# Altium PCB Satellite_4U_Laser_Int_Ext_V11.PcbDoc (part 1 of 2)
Units mm, origin at the board's own origin, x right, y up, seen from the top; angles counter-clockwise.
Board outline 82 x 80 mm, 4 copper layers (L1_TOP, L2_SIGNAL, L3_GND, L4_BOT), stack 1.584 mm thick; 192 components, 101 nets, 642 pads, 592 vias.
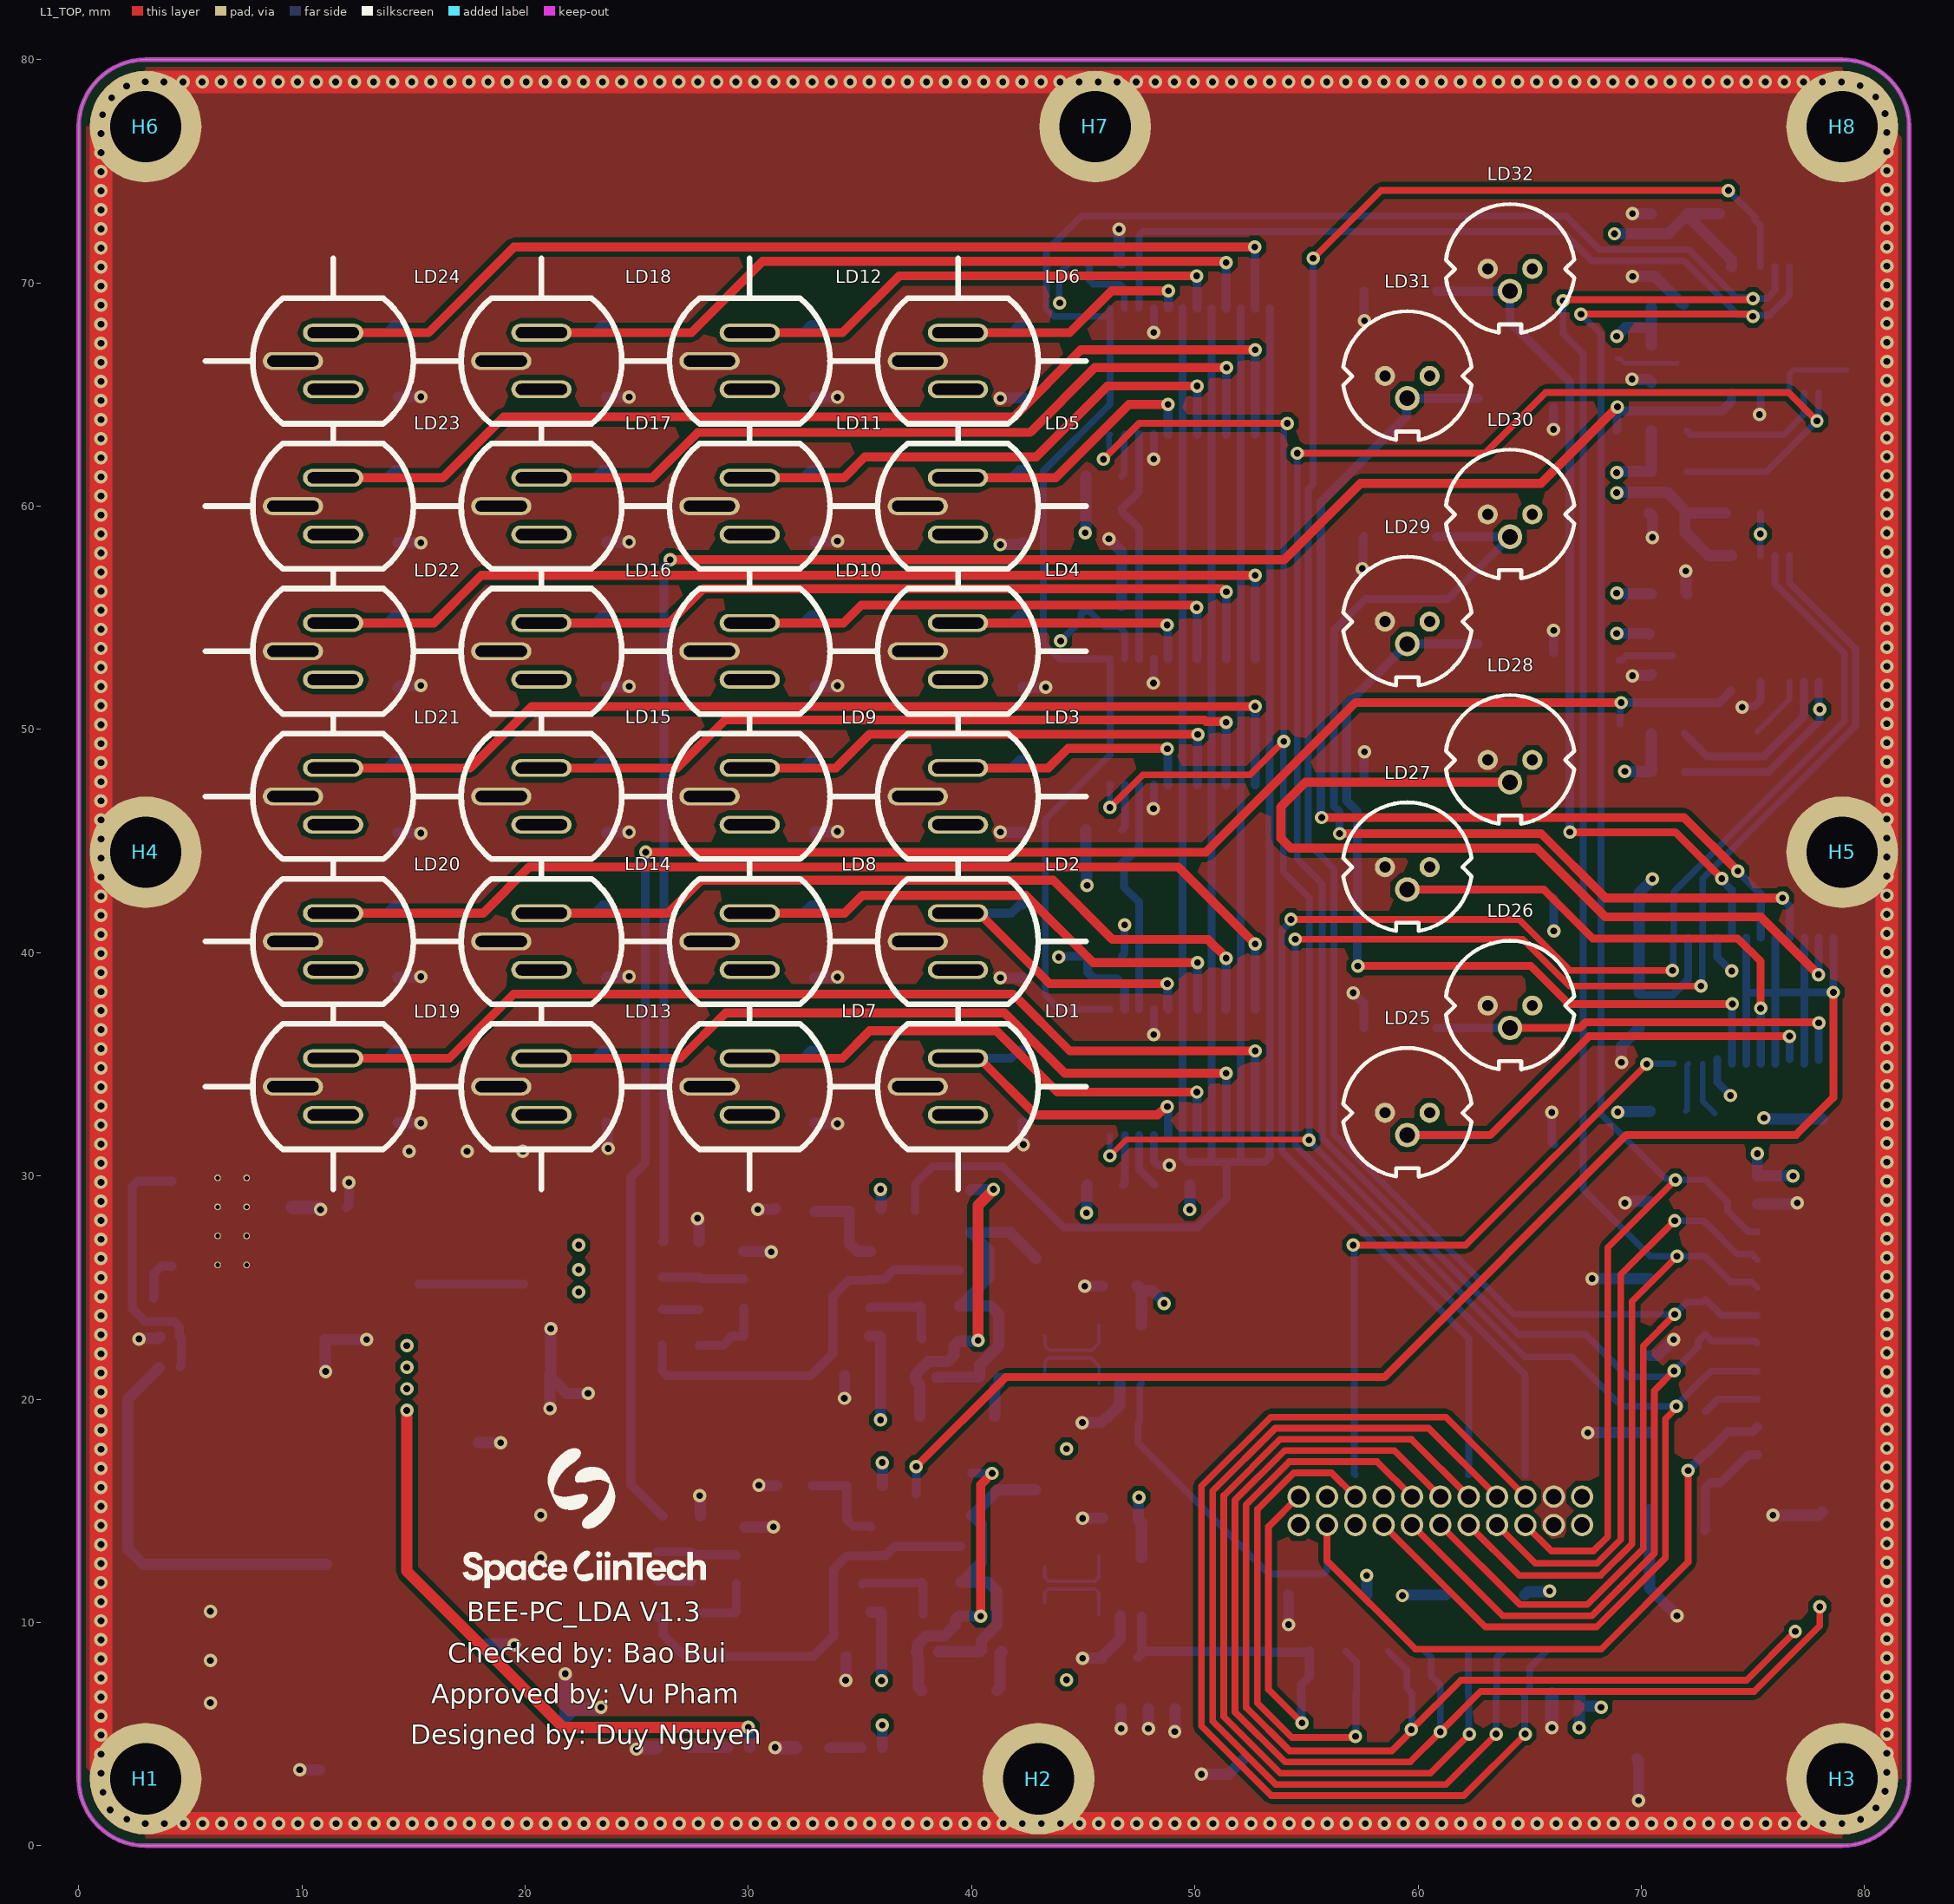
[diagram p0: L1_TOP view]
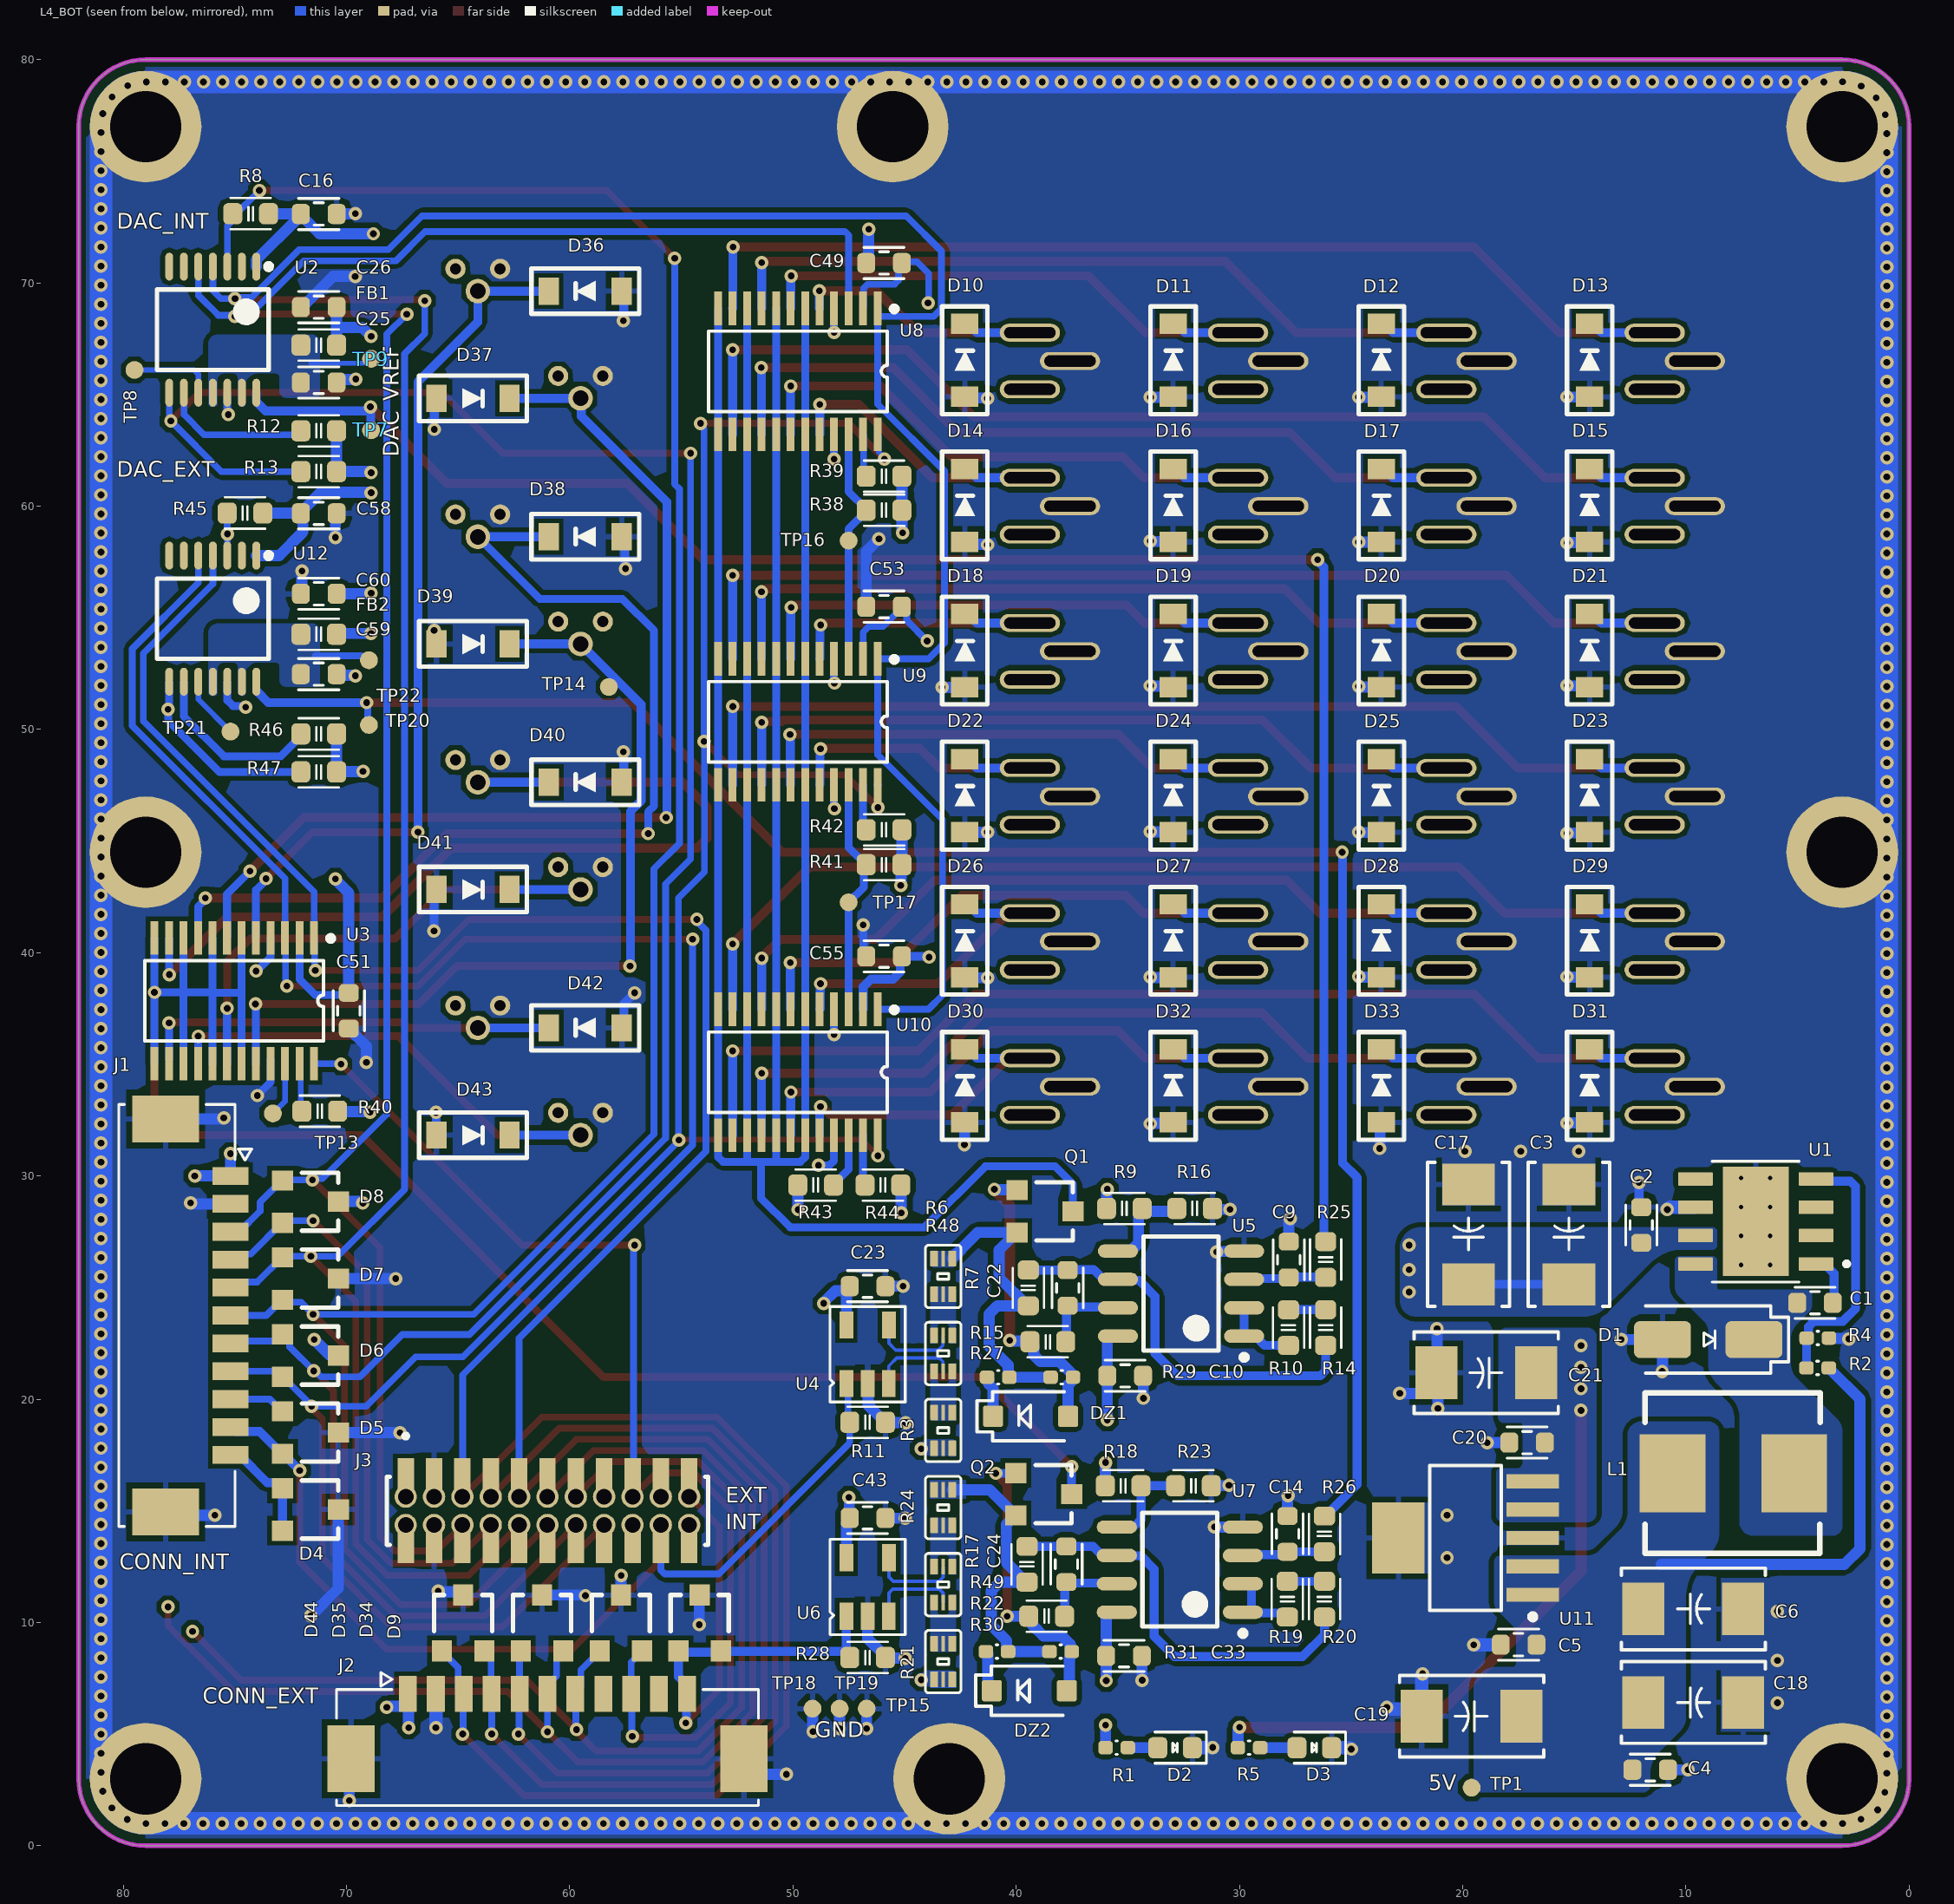
[diagram p1: L4_BOT view, seen from below]
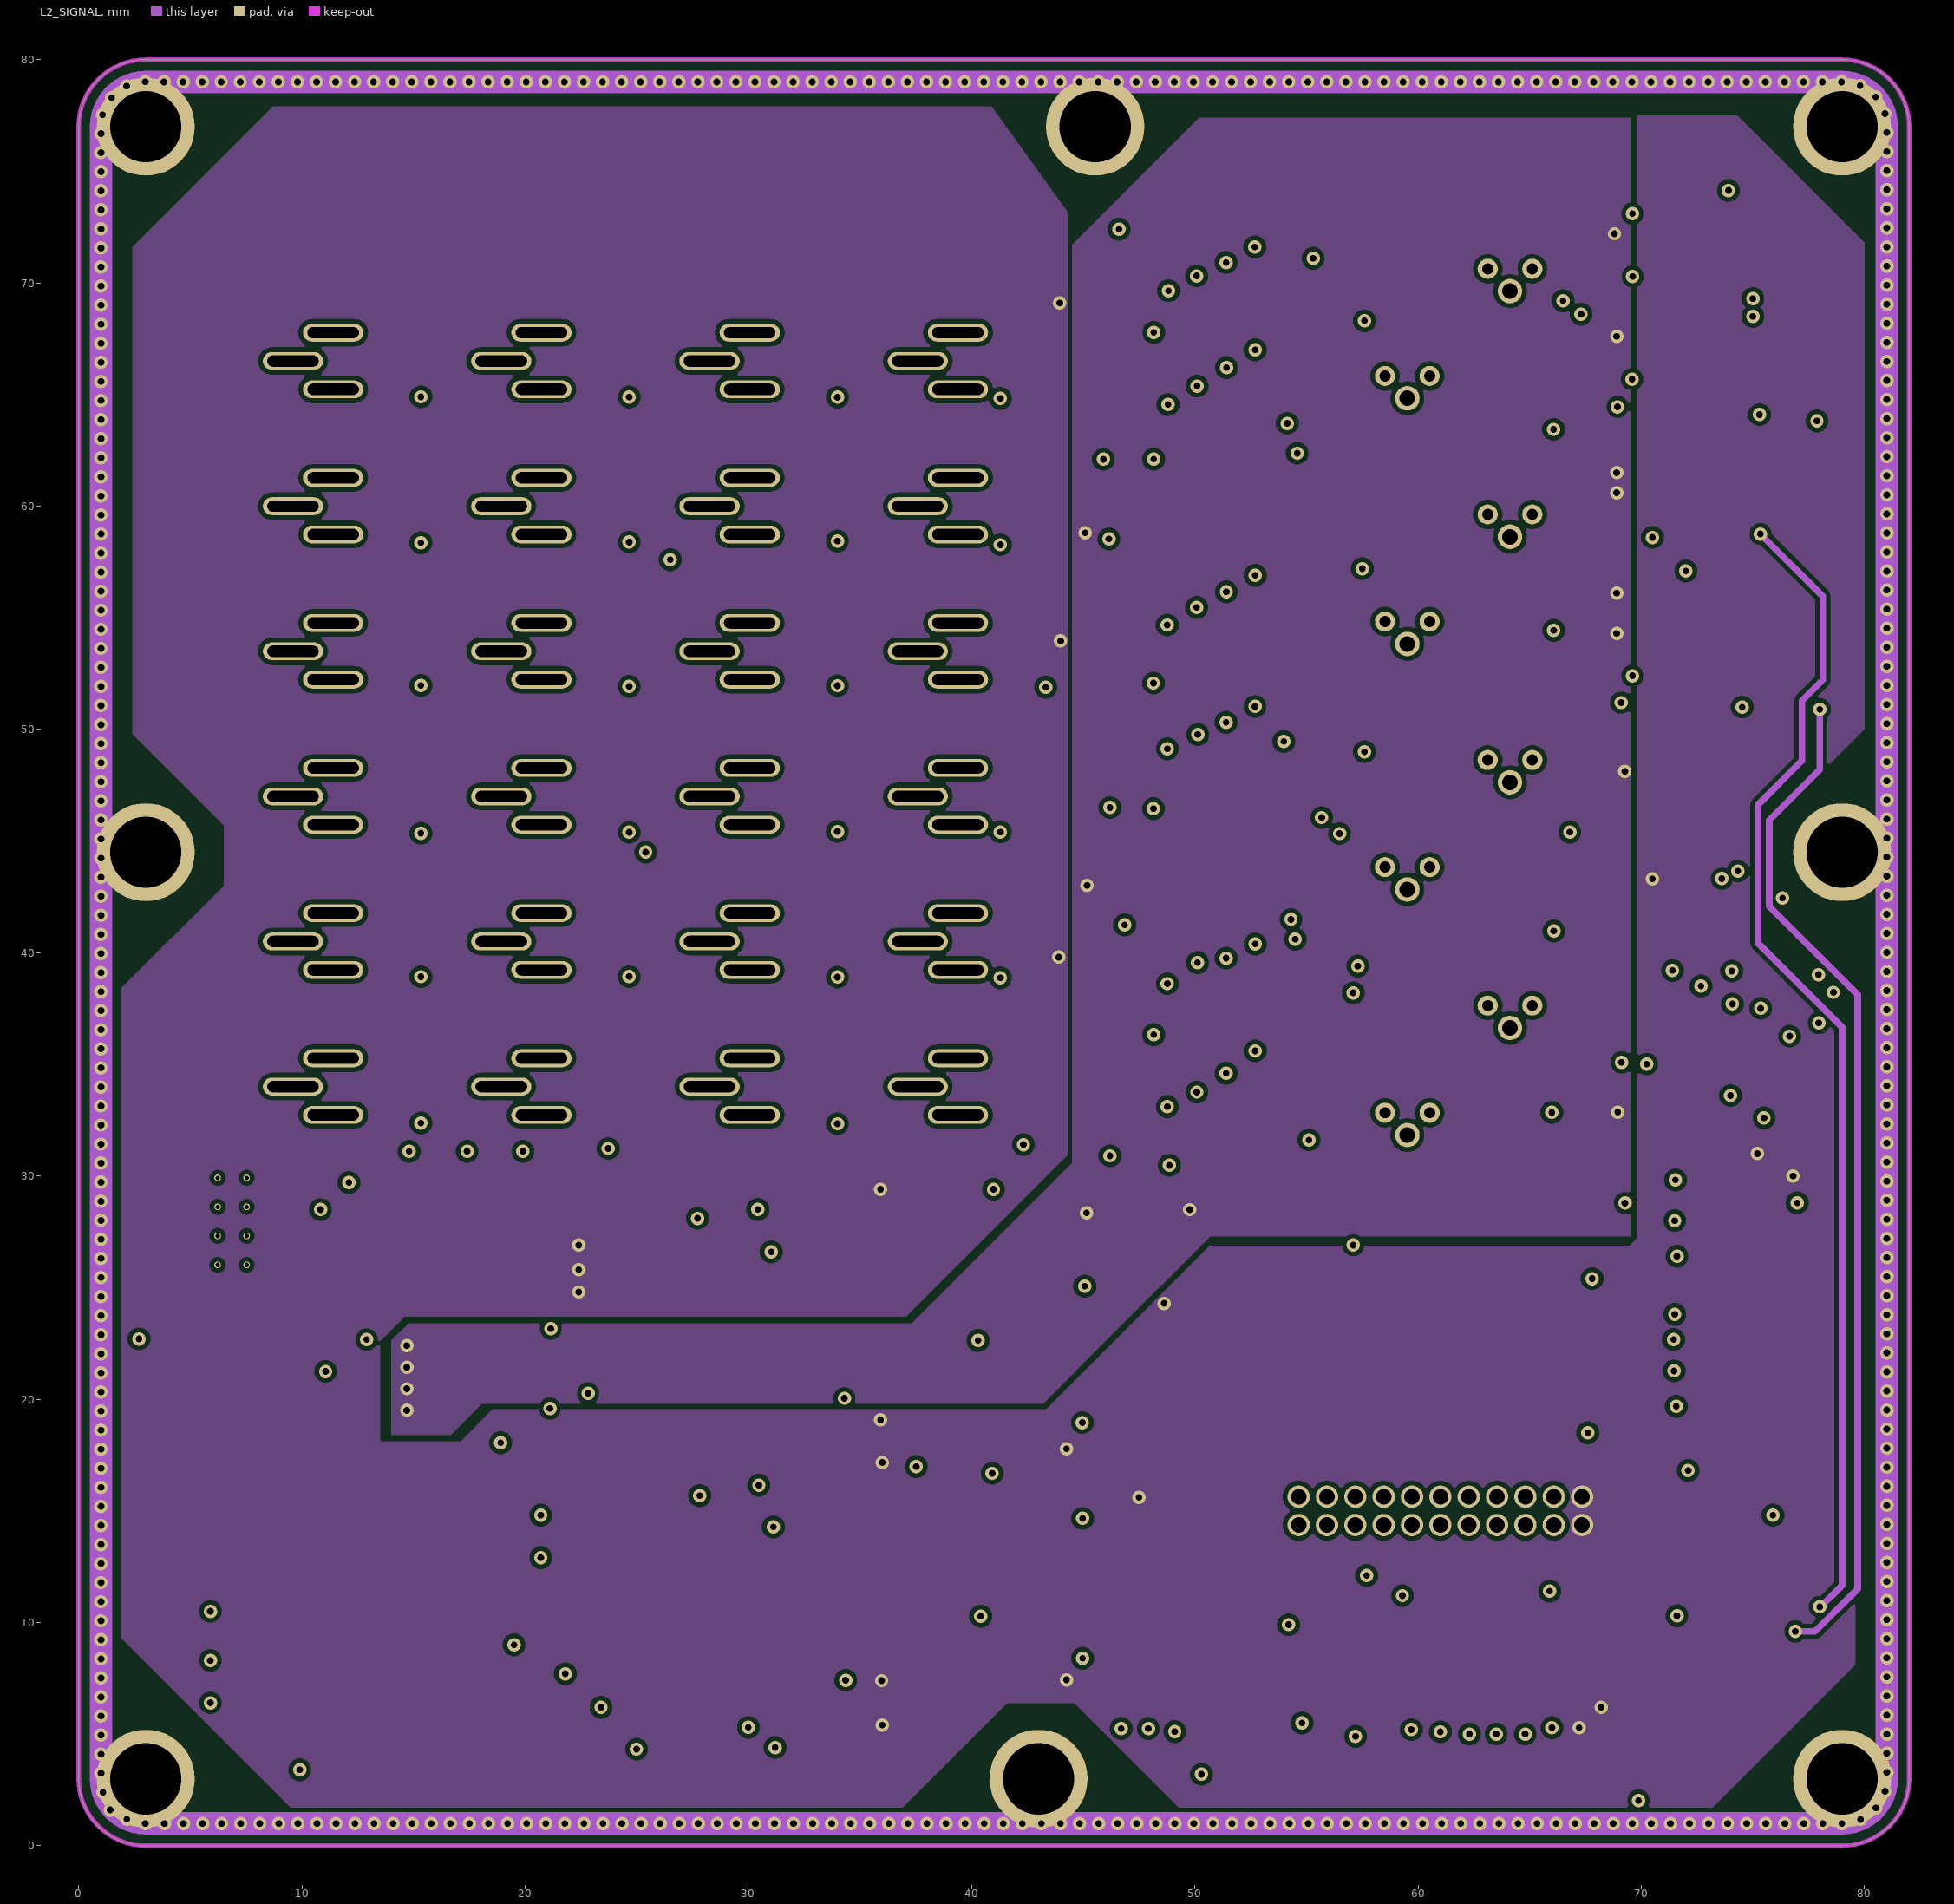
[diagram p2: L2_SIGNAL]
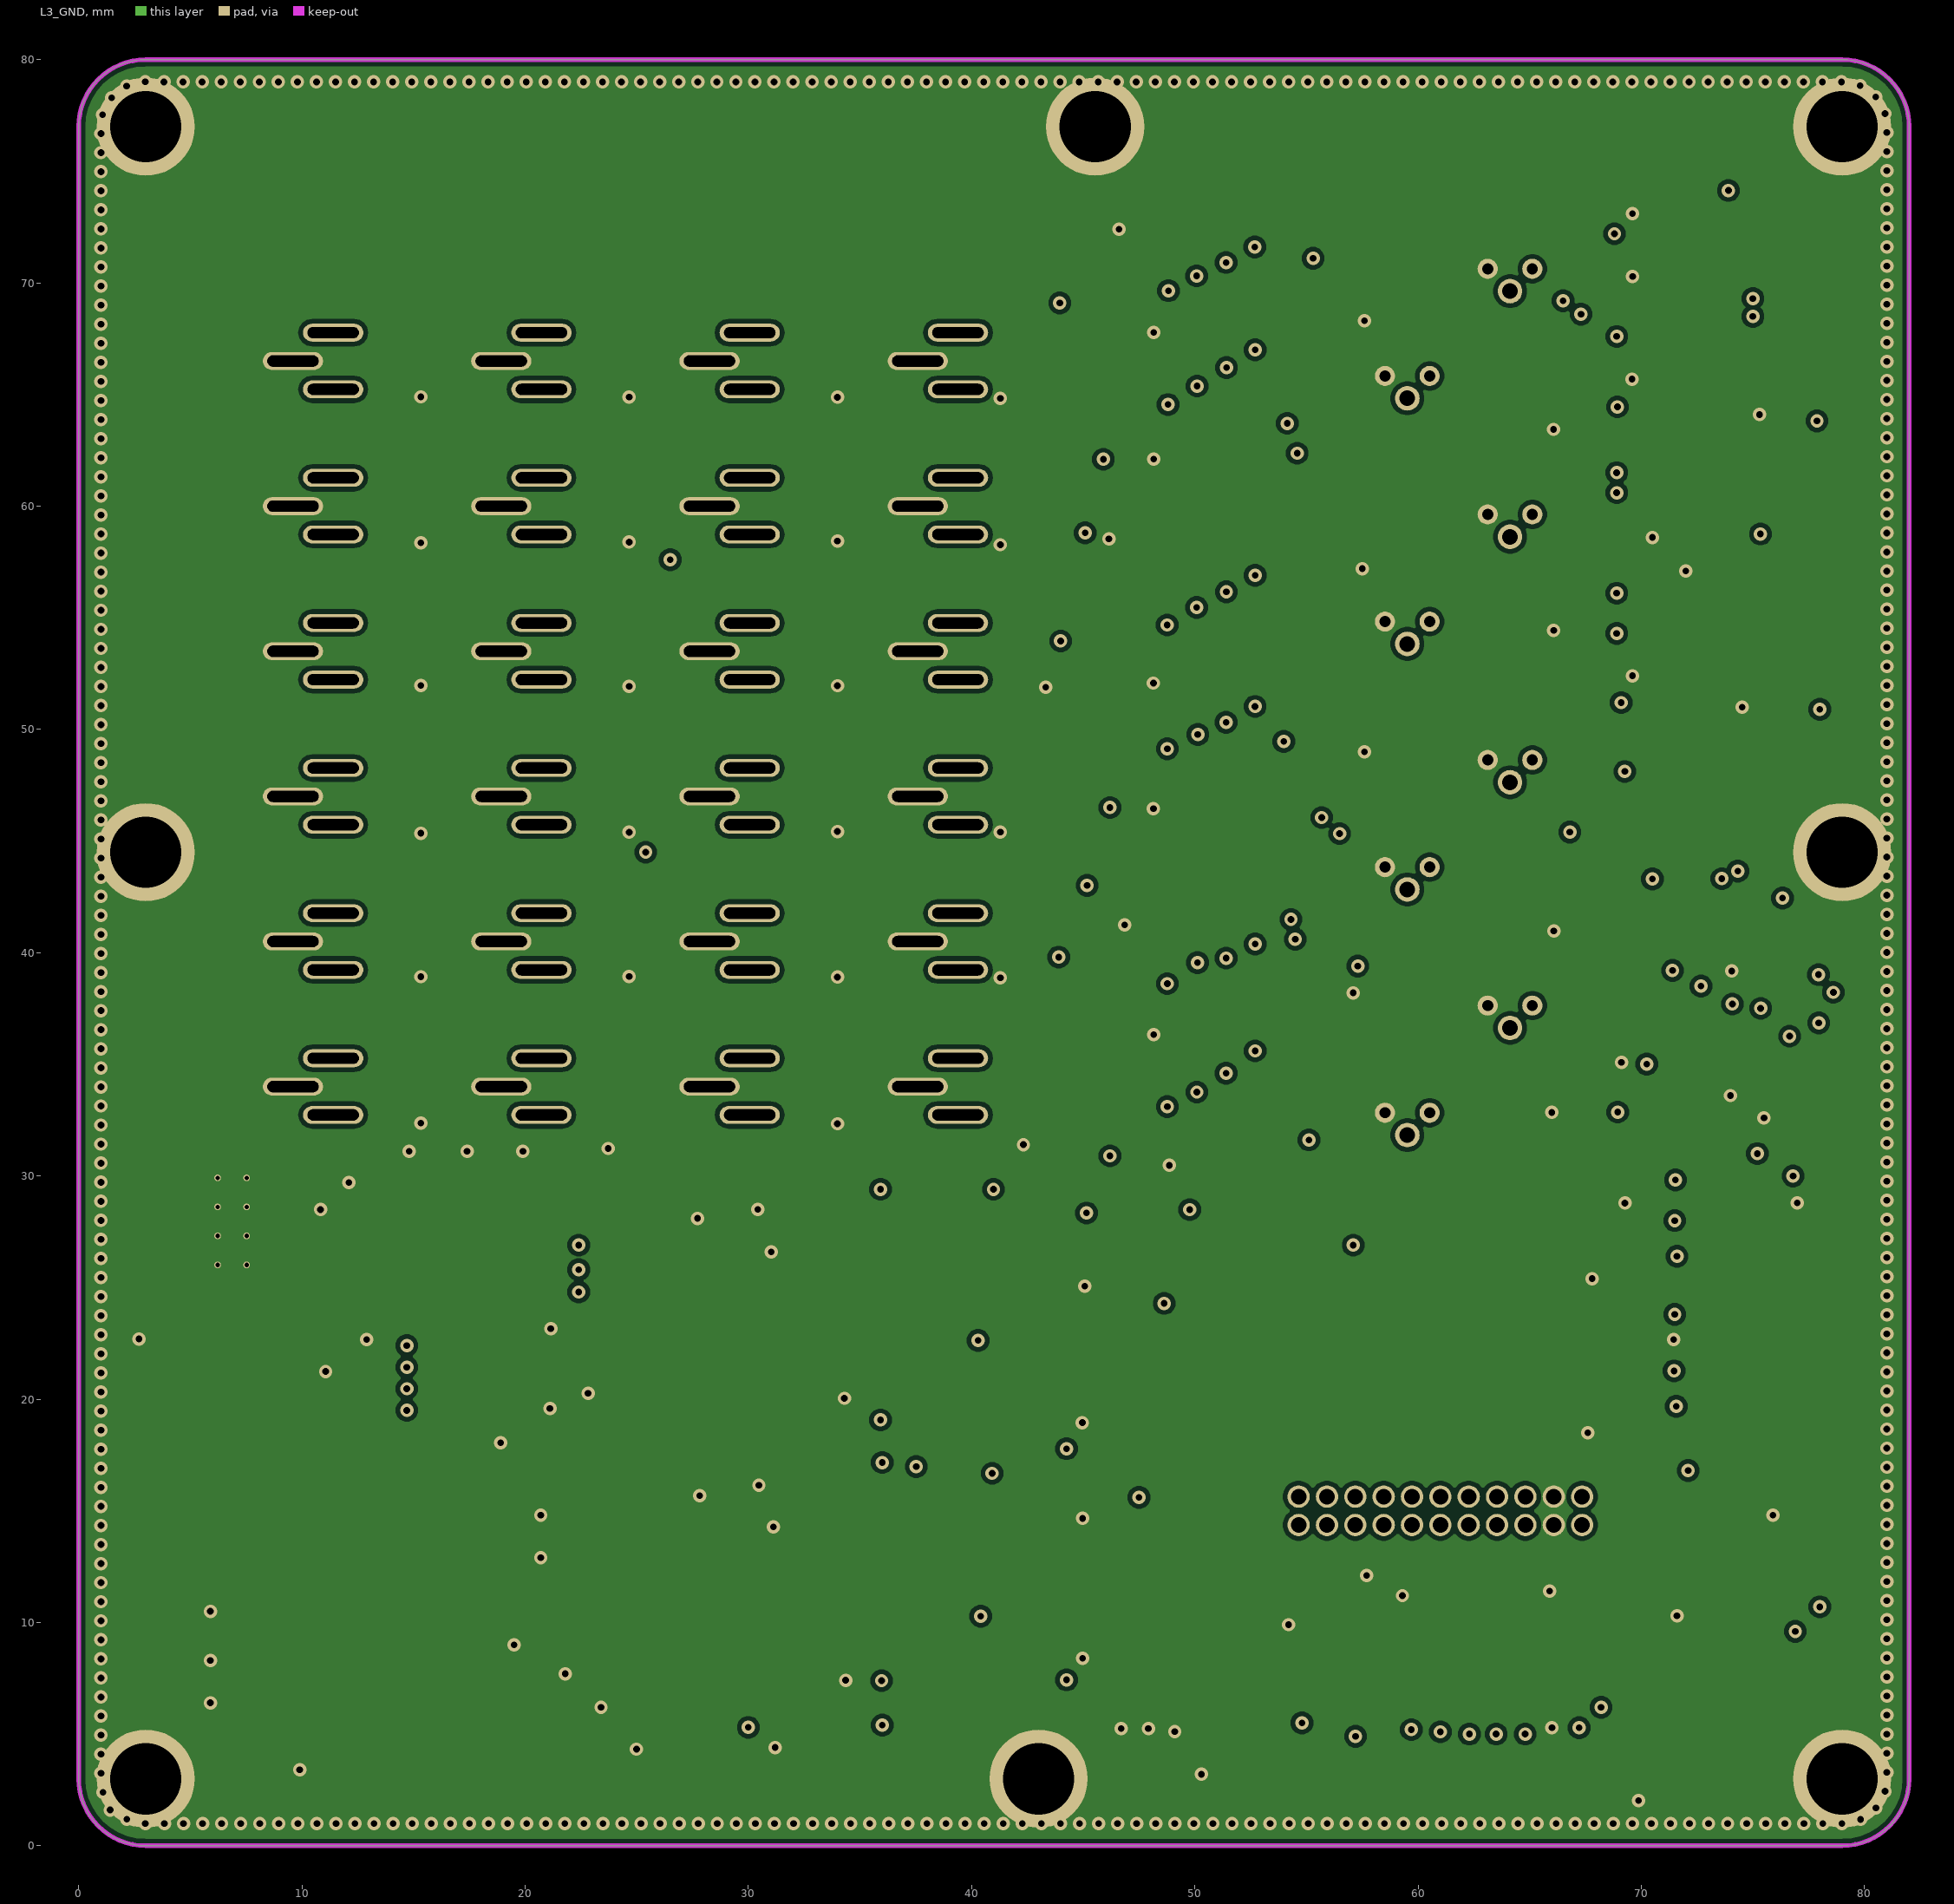
[diagram p3: L3_GND]
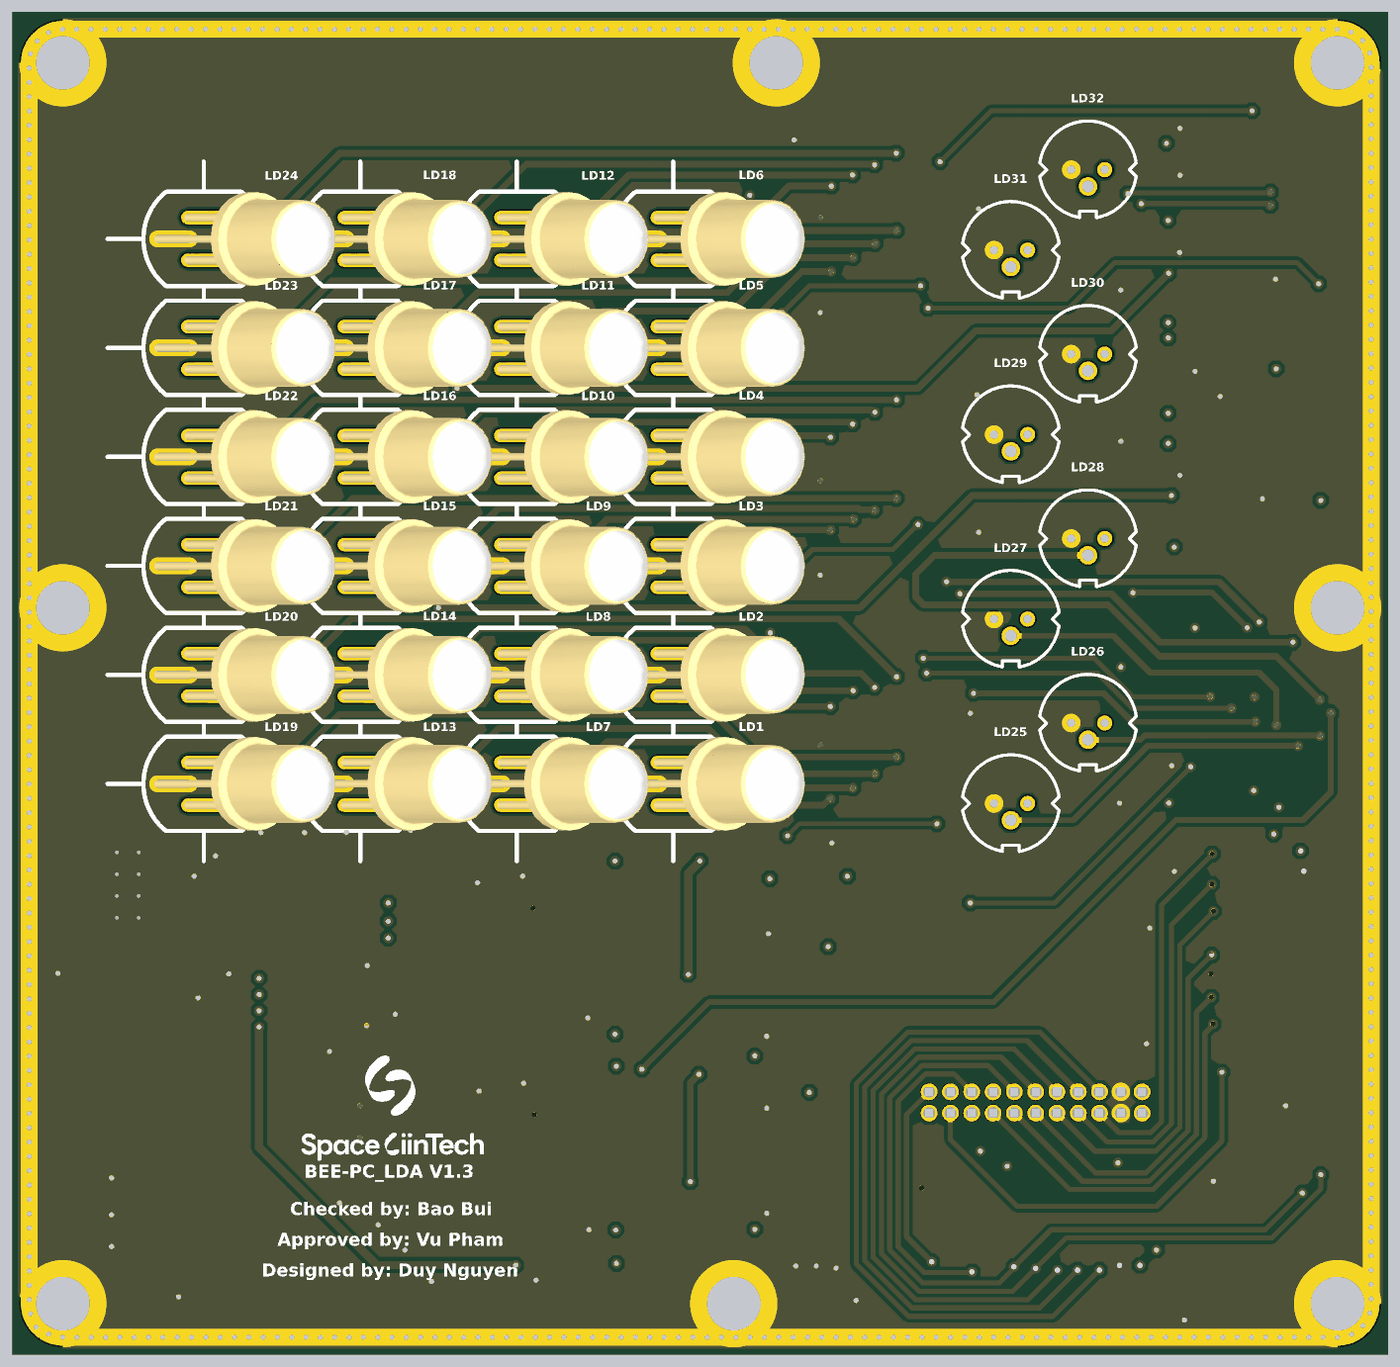
[diagram p5: 3D render of the assembled board from above, using the file's embedded part models]
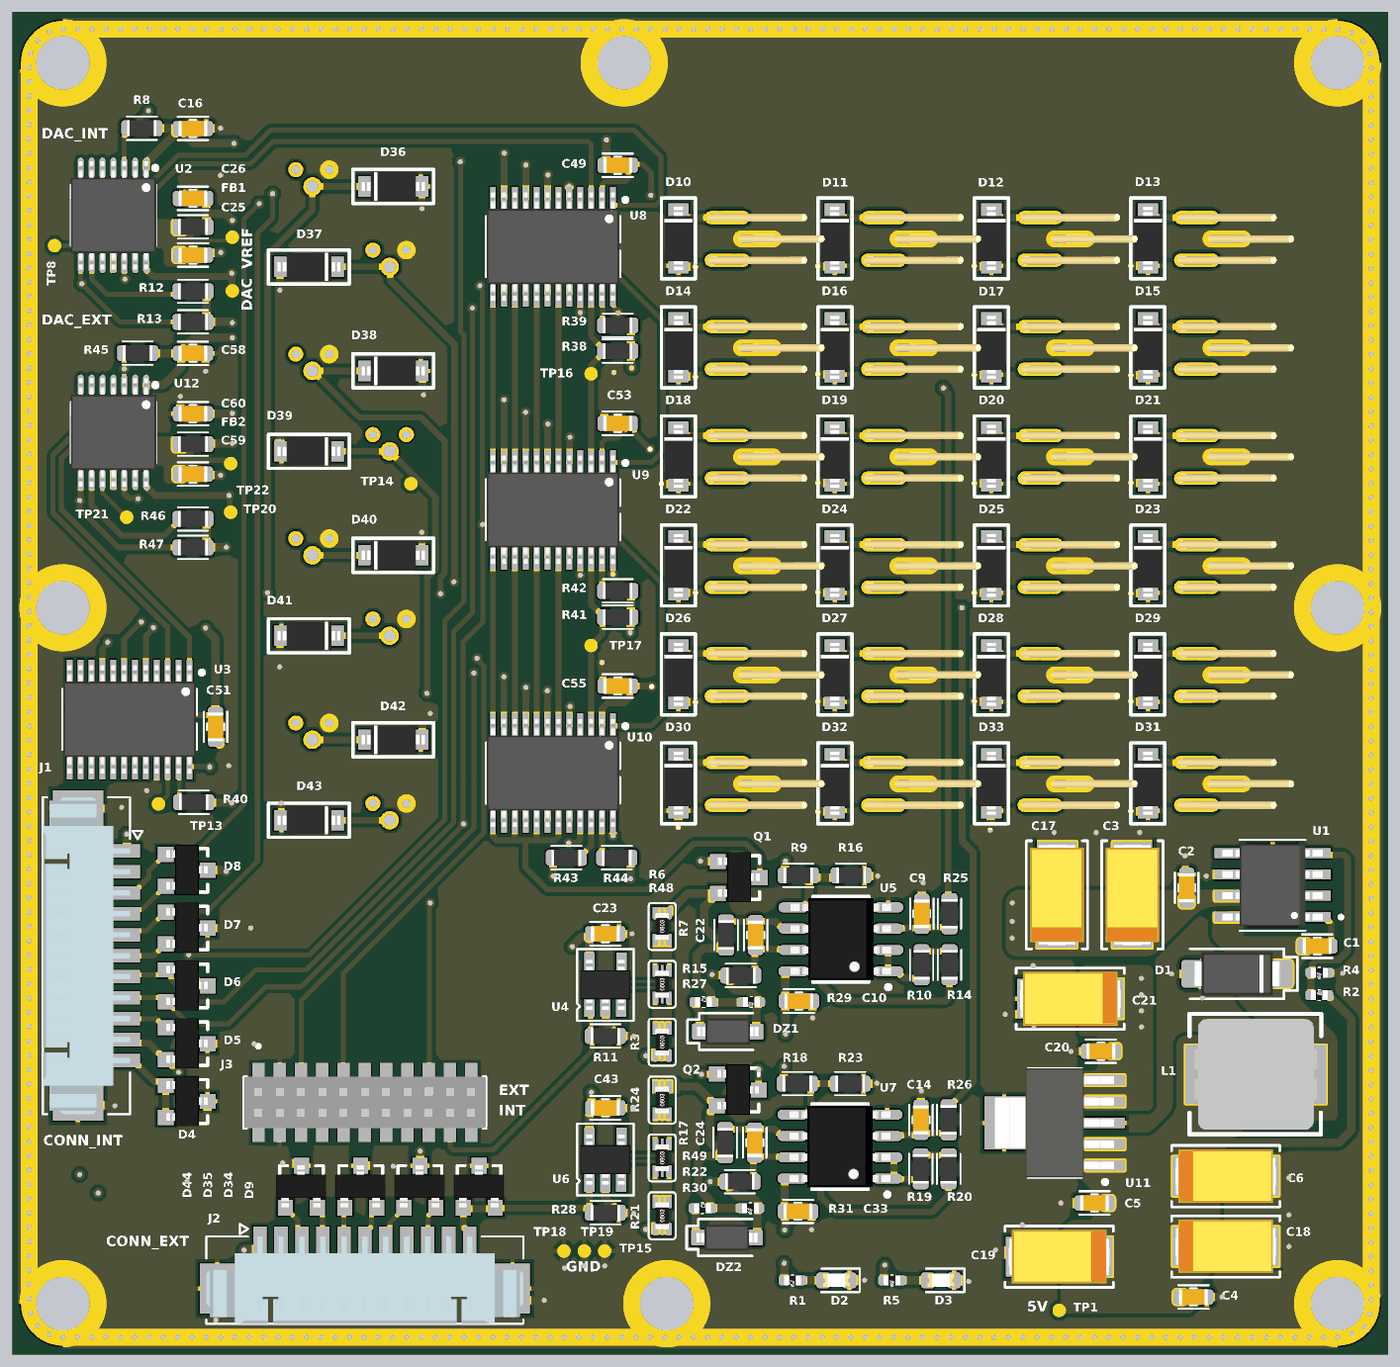
[diagram p6: 3D render of the assembled board from below, using the file's embedded part models]

## Layer stack, top to bottom
Top Solder: solder mask 0.012, Solder Resist, Dk 3.5
L1_TOP: signal copper 0.04
Dielectric 1: prepreg 0.2, FR-4, Dk 4.8
L2_SIGNAL: signal copper 0.032
Dielectric 2: core 1.04, FR-4, Dk 4.8
L3_GND: signal copper 0.032
Dielectric 3: prepreg 0.2, FR-4, Dk 4.8
L4_BOT: signal copper 0.04
Bottom Solder: solder mask 0.012, Solder Resist, Dk 3.5

## Board outline
0,3 0,77 cw(c3,77) 3,80 79,80 cw(c79,77) 82,77 82,3 cw(c79,3) 79,0 3,0 cw(c3,3)

## Design rules (kind name [scope] priority, off if disabled: settings)
Clearance [All] p1: gap=0.2 ignorepadtopadclearanceinfootprint=FALSE except(0.15: Arc-SMDPad Arc-Via Track-SMDPad Track-Via SMDPad-SMDPad SMDPad-Via THPad-Via Via-Via)
ComponentClearance [All] p1: gap=0 collisioncheckmode=3 verticalgap=-2 showdistances=FALSE donotcheckwithout3dbody=TRUE
HoleSize [All] p1: absolutevalues=TRUE maxlimit=10 minlimit=0.025 maxpercent=80.000 minpercent=20.000
HoleToHoleClearance [All] p1: gap=0.25 allowstackedmicrovias=TRUE
MinimumSolderMaskSliver [All] p1: minsoldermaskwidth=0.12
PolygonConnect PolygonConnect_GND [All vs IsNamedPolygon('GND_POUR')] p1: thpad.connectstyle=Direct thpad.reliefconductorwidth=0.254 thpad.reliefentries=4 thpad.polygonreliefangle="90 Angle" thpad.airgapwidth=0.254 smdpad.connectstyle=Relief smdpad.reliefconductorwidth=0.254 smdpad.reliefentries=4 smdpad.polygonreliefangle="90 Angle" smdpad.airgapwidth=0.254 via.connectstyle=Direct via.reliefconductorwidth=0.254 via.reliefentries=4 via.polygonreliefangle="90 Angle" via.airgapwidth=0.254
PolygonConnect [All] p2: connectstyle=Direct reliefconductorwidth=0.254 reliefentries=4 polygonreliefangle="90 Angle" airgapwidth=0.254
RoutingVias [All] p1: holewidth=0.3 width=0.6 viastyle="Through Hole" minholewidth=0.2 minwidth=0.4 maxholewidth=0.3 maxwidth=0.6
SilkToSilkClearance [All] p1: silktosilkclearance=0.15
SilkToSolderMaskClearance [IsPad] p1: minsilkscreentomaskgap=0.1 clearancetoexposedcopper=TRUE
SolderMaskExpansion [All] p1: expansion=0.1 istentingtop=FALSE
SupplyNets "Schematic Supply Nets_8" [InNet('VREF_DAC_EXT')] p1: voltage=0.000
SupplyNets "Schematic Supply Nets_7" [InNet('VREF_DAC_INT')] p2: voltage=0.000
SupplyNets "Schematic Supply Nets_6" [InNet('5V')] p3: voltage=0.000
SupplyNets "Schematic Supply Nets_4" [InNet('I_LD_INT')] p4: voltage=0.000
SupplyNets "Schematic Supply Nets_3" [InNet('I_LD_EXT')] p5: voltage=0.000
SupplyNets "Schematic Supply Nets_2" [InNet('3V3')] p6: voltage=0.000
SupplyNets "Schematic Supply Nets_1" [InNet('GND')] p7: voltage=0.000
SupplyNets "Schematic Supply Nets" [InNet('12V_EXP')] p8: voltage=0.000
Width [All] p1: maxlimit=5 minlimit=0.1 preferedwidth=0.5 minimp=50.000000 maximp=50.000000 favimp=50.000000
24 further rules are at their usual default settings.

## Classes and differential pairs
component class MOUNTING: H1 H2 H3 H4 H5 H6 H7 H8
net class POWER: 3V3 12V_EXP
component class 6_SWITCHING: C49 C51 C53 C55 D10 D11 D12 D13 D14 D15 D16 D17 D18 D19 D20 D21 D22 D23 D24 D25 D26 D27 D28 D29 D30 D31 D32 D33 D36 D37 D38 D39 D40 D41 D42 D43 LD1 LD2 LD3 LD4 LD5 LD6 LD7 LD8 LD9 LD10 LD11 LD12 LD13 LD14 LD15 LD16 LD17 LD18 LD19 LD20 LD21 LD22 LD23 LD24 LD25 LD26 LD27 LD28 LD29 LD30 LD31 LD32 R38 R39 R40 R41 R42 R43 R44 t TP13 TP14 TP15 TP16 TP17 TP18 TP19 U3 U8 U9 U10
component class 5_CURRENT_SOURCE: C9 C10 C14 C16 C22 C23 C24 C25 C26 C33 C43 C58 C59 C60 DZ1 DZ2 FB1 FB2 Q1 Q2 R3 R6 R7 R8 R9 R10 R11 R12 R13 R14 R15 R16 R17 R18 R19 R20 R21 R22 R23 R24 R25 R26 R27 R28 R29 R30 R31 R45 R46 R47 R48 R49 TP7 TP8 TP9 TP20 TP21 TP22 U2 U4 U5 U6 U7 U12
component class 4_COMMUNICATION: D4 D5 D6 D7 D8 D9 D34 D35 D44 J1 J2 J3
component class "3_POWER SWITCH AND LDO": C1 C2 C3 C4 C5 C6 C17 C18 C19 C20 C21 D1 D2 D3 L1 R1 R2 R4 R5 TP1 U1 U11

## Components (designator, comment, footprint, x,y, rotation, side; value= is the part's Value field where it differs from the comment)
C1 "0.01uF/16V" CAP_C_1608X80 4.217,24.318 r180 bottom
C2 "0.22uF/25V" CAP_C_1608X80 12,27.8 r270 bottom
C3 "47uF/20V" "CAP TANT 2312" 15.24,27.381 r90 bottom
C4 "0.22uF/25V" CAP_C_1608X80 11.599,3.4 r0 bottom
C5 "0.22uF/25V" CAP_C_1608X80 17.495,9.006 r180 bottom
C6 "47uF/20V" "CAP TANT 2312" 9.671,10.606 r180 bottom
C9 "470pF/50V" CAP_C_1608X80 27.79,26.255 r270 bottom
C10 "0.22uF/25V" CAP_C_1608X80 35.118,21.048 r0 bottom
C14 "470pF/50V" CAP_C_1608X80 27.844,13.964 r270 bottom
C16 "0.22uF/25V" CAP_C_1608X80 71.247,73.085 r0 bottom
C17 "47uF/20V" "CAP TANT 2312" 19.739,27.381 r90 bottom
C18 "47uF/20V" "CAP TANT 2312" 9.671,6.415 r180 bottom
C19 "47uF/20V" "CAP TANT 2312" 19.6,5.8 r0 bottom
C20 "0.22uF/25V" CAP_C_1608X80 17.114,18.056 r180 bottom
C21 "47uF/20V" "CAP TANT 2312" 18.942,21.185 r0 bottom
C22 "2200pF/50V" CAP_C_1608X80 37.696,24.985 r270 bottom
C23 "0.22uF/25V" CAP_C_1608X80 46.658,25.06 r0 bottom
C24 "2200pF/50V" CAP_C_1608X80 37.75,12.605 r270 bottom
C25 "0.22uF/25V" CAP_C_1608X80 71.247,65.538 r0 bottom
C26 "0.22uF/25V" CAP_C_1608X80 71.247,68.912 r180 bottom
C33 "0.22uF/25V" CAP_C_1608X80 35.172,8.503 r0 bottom
C43 "0.22uF/25V" CAP_C_1608X80 46.658,14.681 r0 bottom
C49 "0.22uF/25V" CAP_C_1608X80 45.922,70.89 r180 bottom
C51 "0.22uF/25V" CAP_C_1608X80 69.9,37.4 r90 bottom
C53 "0.22uF/25V" CAP_C_1608X80 45.922,55.499 r180 bottom
C55 "0.22uF/25V" CAP_C_1608X80 45.921,39.836 r180 bottom
C58 "0.22uF/25V" CAP_C_1608X80 71.247,59.677 r0 bottom
C59 "0.22uF/25V" CAP_C_1608X80 71.247,52.474 r0 bottom
C60 "0.22uF/25V" CAP_C_1608X80 71.247,56.076 r180 bottom
D1 "SS54" DO-214AC_SMA 8.999,22.671 r0 bottom
D2 "LED_YELLOW" LED_0603 32.884,4.39 r0 bottom
D3 "LED_RED" LED_0603 26.648,4.39 r0 bottom
D4 "S2303" SOT23-3-132 71.622,15.058 r270 bottom
D5 "S2303" SOT23-3-132 71.622,18.505 r270 bottom
D6 "S2303" SOT23-3-132 71.622,21.953 r270 bottom
D7 "S2303" SOT23-3-132 71.622,25.4 r270 bottom
D8 "S2303" SOT23-3-132 71.622,28.848 r270 bottom
D9 "S2303" SOT23-3-132 54.18,9.979 r180 bottom
D10 "1N4148W-TP" SOD23 42.304,64.881 r90 bottom value=1N5007
D11 "1N4148W-TP" SOD23 32.974,64.881 r90 bottom value=1N5007
D12 "1N4148W-TP" SOD23 23.644,64.881 r90 bottom value=1N5007
D13 "1N4148W-TP" SOD23 14.314,64.881 r90 bottom value=1N5007
D14 "1N4148W-TP" SOD23 42.304,58.381 r90 bottom value=1N5007
D15 "1N4148W-TP" SOD23 14.314,58.381 r90 bottom value=1N5007
D16 "1N4148W-TP" SOD23 32.974,58.381 r90 bottom value=1N5007
D17 "1N4148W-TP" SOD23 23.644,58.381 r90 bottom value=1N5007
D18 "1N4148W-TP" SOD23 42.304,51.881 r90 bottom value=1N5007
D19 "1N4148W-TP" SOD23 32.974,51.881 r90 bottom value=1N5007
D20 "1N4148W-TP" SOD23 23.644,51.881 r90 bottom value=1N5007
D21 "1N4148W-TP" SOD23 14.314,51.881 r90 bottom value=1N5007
D22 "1N4148W-TP" SOD23 42.304,45.381 r90 bottom value=1N5007
D23 "1N4148W-TP" SOD23 14.314,45.381 r90 bottom value=1N5007
D24 "1N4148W-TP" SOD23 32.974,45.381 r90 bottom value=1N5007
D25 "1N4148W-TP" SOD23 23.644,45.381 r90 bottom value=1N5007
D26 "1N4148W-TP" SOD23 42.304,38.881 r90 bottom value=1N5007
D27 "1N4148W-TP" SOD23 32.974,38.881 r90 bottom value=1N5007
D28 "1N4148W-TP" SOD23 23.644,38.881 r90 bottom value=1N5007
D29 "1N4148W-TP" SOD23 14.314,38.881 r90 bottom value=1N5007
D30 "1N4148W-TP" SOD23 42.304,32.381 r90 bottom value=1N5007
D31 "1N4148W-TP" SOD23 14.314,32.381 r90 bottom value=1N5007
D32 "1N4148W-TP" SOD23 32.974,32.381 r90 bottom value=1N5007
D33 "1N4148W-TP" SOD23 23.644,32.381 r90 bottom value=1N5007
D34 "S2303" SOT23-3-132 57.713,9.979 r180 bottom
D35 "S2303" SOT23-3-132 61.246,9.979 r180 bottom
D36 "1N4148W-TP" SOD23 57.654,69.63 r0 bottom value=1N5007
D37 "1N4148W-TP" SOD23 65.986,64.83 r180 bottom value=1N5007
D38 "1N4148W-TP" SOD23 57.654,58.63 r0 bottom value=1N5007
D39 "1N4148W-TP" SOD23 65.986,53.83 r180 bottom value=1N5007
D40 "1N4148W-TP" SOD23 57.654,47.63 r0 bottom value=1N5007
D41 "1N4148W-TP" SOD23 65.986,42.83 r180 bottom value=1N5007
D42 "1N4148W-TP" SOD23 57.654,36.63 r0 bottom value=1N5007
D43 "1N4148W-TP" SOD23 65.986,31.83 r180 bottom value=1N5007
D44 "S2303" SOT23-3-132 64.779,9.979 r180 bottom
DZ1 "KDZLVTFTR51" SOD3717X145N 39.359,19.234 r180 bottom
DZ2 "KDZLVTFTR51" SOD3717X145N 39.413,6.944 r180 bottom
FB1 "BLM18PG121SN1D" IND_C_1608X60 71.247,67.212 r180 bottom
FB2 "BLM18PG121SN1D" IND_C_1608X60 71.247,54.262 r180 bottom
H1 "hole_space" HEX-M3_NoVia_Smaller 3,3 r0 top
H2 "hole_space" HEX-M3_NoVia_Smaller 43,3 r0 top locked
H3 "hole_space" HEX-M3_NoVia_Smaller 79,3 r0 top locked
H4 "hole_space" HEX-M3_NoVia_Smaller 3,44.5 r0 top locked
H5 "hole_space" HEX-M3_NoVia_Smaller 79,44.5 r0 top locked
H6 "hole_space" HEX-M3_NoVia_Smaller 3,77 r0 top
H7 "hole_space" HEX-M3_NoVia_Smaller 45.536,77 r0 top locked
H8 "hole_space" HEX-M3_NoVia_Smaller 79,77 r0 top locked
J1 "0532611171" MOLEX_0532611171 77.6,23.75 r270 bottom locked
J2 "0532611171" MOLEX_0532611171 61,4.4 r180 bottom locked
J3 "CLP-111-02-X-D" SAMTEC_CLP-111-02-X-D 61,15 r180 bottom locked
L1 "SRP7050TA-220M" PSM6050 7.874,16.675 r90 bottom
LD1 "LaserDiode" OPV302 39.39,34 r0 top locked
LD2 "LaserDiode" OPV302 39.39,40.5 r0 top locked
LD3 "LaserDiode" OPV302 39.39,47 r0 top locked
LD4 "LaserDiode" OPV302 39.39,53.5 r0 top locked
LD5 "LaserDiode" OPV302 39.39,60 r0 top locked
LD6 "LaserDiode" OPV302 39.39,66.5 r0 top locked
LD7 "LaserDiode" OPV302 30.06,34 r0 top locked
LD8 "LaserDiode" OPV302 30.06,40.5 r0 top locked
LD9 "LaserDiode" OPV302 30.06,47 r0 top locked
LD10 "LaserDiode" OPV302 30.06,53.5 r0 top locked
LD11 "LaserDiode" OPV302 30.06,60 r0 top locked
LD12 "LaserDiode" OPV302 30.06,66.5 r0 top locked
LD13 "LaserDiode" OPV302 20.73,34 r0 top locked
LD14 "LaserDiode" OPV302 20.73,40.5 r0 top locked
LD15 "LaserDiode" OPV302 20.73,47 r0 top locked
LD16 "LaserDiode" OPV302 20.73,53.5 r0 top locked
LD17 "LaserDiode" OPV302 20.73,60 r0 top locked
LD18 "LaserDiode" OPV302 20.73,66.5 r0 top locked
LD19 "LaserDiode" OPV302 11.4,34 r0 top locked
LD20 "LaserDiode" OPV302 11.4,40.5 r0 top locked
LD21 "LaserDiode" OPV302 11.4,47 r0 top locked
LD22 "LaserDiode" OPV302 11.4,53.5 r0 top locked
LD23 "LaserDiode" OPV302 11.4,60 r0 top locked
LD24 "LaserDiode" OPV302 11.4,66.5 r0 top locked
LD25 "LaserDiode" RLD65NZX1 59.52,32.83 r90 top locked
LD26 "LaserDiode" RLD65NZX1 64.12,37.63 r90 top locked
LD27 "LaserDiode" RLD65NZX1 59.52,43.83 r90 top locked
LD28 "LaserDiode" RLD65NZX1 64.12,48.63 r90 top locked
LD29 "LaserDiode" RLD65NZX1 59.52,54.83 r90 top locked
LD30 "LaserDiode" RLD65NZX1 64.12,59.63 r90 top locked
LD31 "LaserDiode" RLD65NZX1 59.52,65.83 r90 top locked
LD32 "LaserDiode" RLD65NZX1 64.12,70.63 r90 top locked
Q1 "DMP3098L-7" SOT23-3-132 38.712,28.414 r270 bottom
Q2 "DMP3098L-7" SOT23-3-132 38.766,15.742 r270 bottom
R1 "1k" RES_C_1005X40 35.5,4.39 r0 bottom
R2 "10k" RES_C_1005X40 4.1,21.4 r180 bottom
R3 "221R/1%" RES_SMD_0603_SHUNT 43.272,18.598 r90 bottom
R4 "3.24k" RES_C_1005X40 4.091,22.738 r0 bottom
R5 "1k" RES_C_1005X40 29.569,4.39 r0 bottom
R6 "51R/1%" RES_SMD_0603_SHUNT 43.272,25.5 r90 bottom
R7 "100k" RES_C_1608X60 39.462,24.985 r270 bottom
R8 "4.7k" RES_C_1608X60 74.295,73.098 r0 bottom
R9 "10k" RES_C_1608X60 35.156,28.541 r180 bottom
R10 "47k" RES_C_1608X60 27.803,23.207 r90 bottom
R11 "7.5k" RES_C_1608X60 46.658,18.964 r180 bottom
R12 "4.7k" RES_C_1608X60 71.247,63.373 r180 bottom
R13 "4.7k" RES_C_1608X60 71.247,61.549 r180 bottom
R14 "47k" RES_C_1608X60 26.139,23.207 r270 bottom
R15 "140R" RES_C_1608X60 38.585,22.572 r0 bottom
R16 "10k" RES_C_1608X60 32.007,28.541 r180 bottom
R17 "100k" RES_C_1608X60 39.515,12.605 r270 bottom
R18 "10k" RES_C_1608X60 35.21,16.123 r180 bottom
R19 "47k" RES_C_1608X60 27.857,11.043 r90 bottom
R20 "47k" RES_C_1608X60 26.193,11.043 r270 bottom
R21 "51R/1%" RES_SMD_0603_SHUNT 43.272,8.244 r90 bottom
R22 "140R" RES_C_1608X60 38.639,10.281 r0 bottom
R23 "10k" RES_C_1608X60 32.061,16.123 r180 bottom
R24 "10R/1%" RES_SMD_0603_SHUNT 43.272,15.146 r90 bottom
R25 "1k" RES_C_1608X60 26.139,26.255 r270 bottom
R26 "1k" RES_C_1608X60 26.193,13.964 r270 bottom
R27 "10k" RES_C_1005X40 40.809,20.984 r180 bottom
R28 "5.1k" RES_C_1608X60 46.658,8.427 r180 bottom
R29 "1M" RES_C_1005X40 37.959,20.984 r0 bottom
R30 "10k" RES_C_1005X40 40.863,8.694 r180 bottom
R31 "1M" RES_C_1005X40 38.012,8.694 r0 bottom
R38 "4.7k" RES_C_1608X60 45.921,59.817 r0 bottom
R39 "4.7k" RES_C_1608X60 45.922,61.341 r180 bottom
R40 "4.7k" RES_C_1608X60 71.2,32.9 r180 bottom
R41 "4.7k" RES_C_1608X60 45.921,43.942 r0 bottom
R42 "4.7k" RES_C_1608X60 45.922,45.506 r180 bottom
R43 "4.7k" RES_C_1608X60 48.984,29.591 r180 bottom
R44 "4.7k" RES_C_1608X60 45.974,29.591 r180 bottom
R45 "4.7k" RES_C_1608X60 74.549,59.69 r0 bottom
R46 "4.7k" RES_C_1608X60 71.247,49.8 r180 bottom
R47 "4.7k" RES_C_1608X60 71.247,48.1 r180 bottom
R48 "40.2R/1%" RES_SMD_0603_SHUNT 43.272,22.049 r90 bottom
R49 "10R/1%" RES_SMD_0603_SHUNT 43.272,11.695 r90 bottom
TP1 "" Testpoint_80 19.6,2.6 r180 bottom
TP7 "" Testpoint_80 68.9,63.4 r180 bottom
TP8 "" Testpoint_80 79.5,66.1 r180 bottom
TP9 "" Testpoint_80 68.9,66.6 r180 bottom
TP13 "" Testpoint_80 73.3,32.8 r90 bottom
TP14 "" Testpoint_80 58.25,51.9 r90 bottom
TP15 "" Testpoint_80 46.7,6.139 r90 bottom
TP16 "" Testpoint_80 47.509,58.454 r90 bottom
TP17 "" Testpoint_80 47.509,42.254 r90 bottom
TP18 "" Testpoint_80 49.127,6.139 r90 bottom
TP19 "" Testpoint_80 47.914,6.139 r90 bottom
TP20 "" Testpoint_80 69,50.2 r180 bottom
TP21 "" Testpoint_80 75.2,49.9 r180 bottom
TP22 "" Testpoint_80 69,53.1 r180 bottom
U1 "TPS5430DDAR" CONV_TPS5430DDAR 6.873,27.963 r0 bottom
U2 "MCP4902-E/ST" TSSOP14 75.991,67.905 r270 bottom
U3 "ADG1414BRUZ" TSSOP24 75.031,37.842 r270 bottom locked
U4 "INA139" SOT23-5 46.658,22.012 r180 bottom
U5 "OPA2192" SO8 32.616,24.731 r0 bottom value=LM358
U6 "INA139" SOT23-5 46.658,11.593 r180 bottom
U7 "OPA2192" SO8 32.67,12.366 r0 bottom value=LM358
U8 "ADG1414BRUZ" TSSOP24 49.784,66.04 r270 bottom locked
U9 "ADG1414BRUZ" TSSOP24 49.784,50.343 r270 bottom locked
U10 "ADG1414BRUZ" TSSOP24 49.784,34.646 r270 bottom locked
U11 "TPS7A4533DCQR" SOT223-6 19.872,13.784 r0 bottom
U12 "MCP4902-E/ST" TSSOP14 75.991,54.96 r270 bottom

## Footprints (in the part's own frame and the unit in brackets; to place one, negate y for a bottom-side part, rotate by r counter-clockwise, add the part's x,y. Pads: shape width x height; smd on the part's side, far side on the other; paste and mask are expansions set on the pad)
"CAP TANT 2312" [mil]
  rect 74x93 smd paste+0: 1(-88,0) 2(88,0)
  silkscreen extent -127,-72 127,72, body extent -118,-63 118,63, height 110
CAP_C_1608X80 [mm] "Chip Capacitor, 2-Leads, Body 1.60x0.80mm, IPC Medium Density"
  rrect50% 0.8x0.9 smd: 1(-0.8,0) 2(0.8,0)
  silkscreen extent -0.9,-0.7 0.9,0.7, body extent -0.87,-0.48 0.87,0.48, height 0.85
CONV_TPS5430DDAR [mm] "IC REG BUCK ADJ 3A 8SOPWR"
  rrect10% 1.55x0.6 smd: 1(-2.7,1.905) 2(-2.7,0.635) 3(-2.7,-0.635) 4(-2.7,-1.905) 5(2.7,-1.905) 6(2.7,-0.635) 7(2.7,0.635) 8(2.7,1.905)
  round 0.3 hole 0.2 mask+0: 6(-0.65,-1.95) 6(-0.65,-0.65) 6(-0.65,0.65) 6(-0.65,1.95) 6(0.65,-1.95) 6(0.65,-0.65) 6(0.65,0.65) 6(0.65,1.95)
  rect 2.95x4.9 smd paste+0: 9(0,0)
  silkscreen extent -4.17,-2.69 1.96,2.72, body extent -3,-2.45 3,2.45, height 1.7
DO-214AC_SMA [mm] "Molded Diode, 2-Leads, Body 5.20x2.61mm, IPC Medium Density"
  rrect30% 2.55x1.65 smd: 1(-2.05,0) 2(2.05,0)
  silkscreen extent -3.6,-1.5 2.8,1.5, body extent -2.6,-1.3 2.6,1.3, height 2.4
HEX-M3_NoVia_Smaller [mm]
  round 5 / inner round 4.4 / far side round 5 hole 3.2: 1(0,0)
IND_C_1608X60 [mm] "Chip Resistor, 2-Leads, Body 1.63x0.83mm, IPC High Density"
  rrect50% 0.85x0.95 smd: 1(-0.8,0) 2(0.8,0)
  silkscreen extent -0.9,-0.7 0.9,0.7, body extent -0.87,-0.48 0.87,0.48, height 0.6
LED_0603 [mm]
  rrect50% 0.85x0.95 smd: 1(-0.775,0) 2(0.775,0)
  silkscreen extent -1.4,-0.7 0.9,0.7, body extent -0.8,-0.4 0.8,0.4, height 0.7
MOLEX_0532611171 [mm]
  rect 0.8x1.6 smd mask+0.076: 1(-6.25,2.4) 2(-5,2.4) 3(-3.75,2.4) 4(-2.5,2.4) 5(-1.25,2.4) 6(0,2.4) 7(1.25,2.4) 8(2.5,2.4) 9(3.75,2.4) 10(5,2.4) 11(6.25,2.4)
  rect 2.1x3 smd mask+0.076: M1(-8.8,-0.5) M2(8.8,-0.5)
  silkscreen extent -9.45,-2.6 9.45,3.35, body extent -9.45,-2.6 9.45,2.6, height 3.4
OPV302 [mm]
  oval 2.7x0.8 hole 0.5 slot 2.3 at 0 deg mask+0.102: 1(0,1.27) 2(-1.8,0) 3(0,-1.27)
  silkscreen extent -3.6,-2.81 3.6,2.81, body extent -6.87,-2.78 9.06,2.78, height 10.42
PSM6050 [mm]
  rect 3.5x2.95 smd: 1(0,-2.725) 2(0,2.725)
  silkscreen extent -3.58,-3.9 3.6,3.96, body extent -3.3,-3.65 3.3,3.65
RES_C_1005X40 [mm]
  rrect50% 0.65x0.6 smd mask+0.05: 1(-0.5,0) 2(0.5,0)
  silkscreen extent -0.04,-0.3 0.04,0.3, body extent -0.5,-0.3 0.5,0.3, height 0.2
RES_C_1608X60 [mm] "Chip Resistor, 2-Leads, Body 1.63x0.83mm, IPC High Density"
  rrect50% 0.85x0.95 smd: 1(-0.8,0) 2(0.8,0)
  silkscreen extent -0.9,-0.7 0.9,0.7, body extent -0.87,-0.48 0.87,0.48, height 0.6
RES_SMD_0603_SHUNT [mm]
  rrect10% 0.7x0.34 smd: 1(-0.8,-0.405) 1(-0.8,0.405) 2(0.8,-0.405) 2(0.8,0.405)
  rrect10% 0.7x0.17 smd: 3(-0.8,0) 4(0.8,0)
  silkscreen extent -1.4,-0.8 1.4,0.8, body extent -0.8,-0.4 0.8,0.4, height 0.43
RLD65NZX1 [mm]
  round 0.9 hole 0.5 mask+0.102: 1(0,1) 2(0,-1)
  round 1.1 hole 0.7 mask+0.102: 3(-1,0)
  silkscreen extent -2.86,-2.88 2.9,2.87, body extent -2.76,-2.78 2.8,2.77, height 3.7
SAMTEC_CLP-111-02-X-D [mm]
  round 1 hole 0.7 mask+0.05: 01(-6.35,0.635) 02(-6.35,-0.635) 03(-5.08,0.635) 04(-5.08,-0.635) 05(-3.81,0.635) 06(-3.81,-0.635) 07(-2.54,0.635) 08(-2.54,-0.635) 09(-1.27,0.635) 10(-1.27,-0.635) 11(0,0.635) 12(0,-0.635) 13(1.27,0.635) 14(1.27,-0.635) 15(2.54,0.635) 16(2.54,-0.635) 17(3.81,0.635) 18(3.81,-0.635) 19(5.08,0.635) 20(5.08,-0.635) 21(6.35,0.635) 22(6.35,-0.635)
  rect 0.737x1.473 smd mask+0.05: 01(-6.35,1.613) 02(-6.35,-1.613) 03(-5.08,1.613) 04(-5.08,-1.613) 05(-3.81,1.613) 06(-3.81,-1.613) 07(-2.54,1.613) 08(-2.54,-1.613) 09(-1.27,1.613) 10(-1.27,-1.613) 11(0,1.613) 12(0,-1.613) 13(1.27,1.613) 14(1.27,-1.613) 15(2.54,1.613) 16(2.54,-1.613) 17(3.81,1.613) 18(3.81,-1.613) 19(5.08,1.613) 20(5.08,-1.613) 21(6.35,1.613) 22(6.35,-1.613)
  silkscreen extent -7.2,-1.52 7.2,3.45, body extent -7.2,-2.16 7.2,2.16, height 2.16
SO8 [mm]
  oval 1.8x0.6 smd: 1(-2.825,1.905) 2(-2.825,0.635) 3(-2.825,-0.635) 4(-2.825,-1.905) 5(2.825,-1.905) 6(2.825,-0.635) 7(2.825,0.635) 8(2.825,1.905)
  silkscreen extent -2.95,-2.55 1.68,2.98, body extent -2.99,-2.45 3,2.45, height 1.6
SOD23 [mm]
  rect 0.91x1.22 smd: 1(0.016,0) 2(3.286,0)
  silkscreen extent -0.76,-1.02 4.06,1.02, body extent -0.22,-0.85 3.53,0.85, height 1.2
SOD3717X145N [mm]
  rrect22% 0.9x0.95 smd: 1(-1.68,0) 2(1.681,-0.003)
  silkscreen extent -2.4,-1.1 1.5,1.1, body extent -1.83,-0.77 1.83,0.77, height 1.5
SOT23-3-132 [mm]
  rect 0.9x0.95 smd: 1(-0.95,-1.25) 2(0.95,-1.25) 3(0,1.25)
  silkscreen extent -1.3,-0.38 1.3,1.25, body extent -1.52,-1.23 1.48,1.27, height 1.06
SOT23-5 [mm]
  rect 0.62x1.22 smd mask+0.076: 1(-0.953,-1.31) 2(-0.003,-1.31) 3(0.947,-1.31) 4(0.952,1.31) 5(-0.953,1.31)
  silkscreen extent -1.69,-2.14 1.69,2.14, body extent -1.5,-1.5 1.5,1.5, height 1.41
SOT223-6 [mm]
  rect 2.346x0.632 smd paste+0: 1(-3.01,2.54) 2(-3.01,1.27) 3(-3.01,0) 4(-3.01,-1.27) 5(-3.01,-2.54)
  rect 2.346x3.172 smd paste+0: 6(3.01,0)
  silkscreen extent -3.13,-3.25 1.6,3.65, body extent -3.55,-3.25 3.55,3.25, height 1.66
Testpoint_80 [mm]
  round 0.8 smd paste-2539.97 mask+0: 1(0,0)
TSSOP14 [mm]
  oval 1.25x0.35 smd mask+0.05: 1(-2.825,1.95) 2(-2.825,1.3) 3(-2.825,0.65) 4(-2.825,0) 5(-2.825,-0.65) 6(-2.825,-1.3) 7(-2.825,-1.95) 8(2.825,-1.95) 9(2.825,-1.3) 10(2.825,-0.65) 11(2.825,0) 12(2.825,0.65) 13(2.825,1.3) 14(2.825,1.95)
  silkscreen extent -2.95,-2.5 1.8,2.63, body extent -3.23,-2.55 3.23,2.55, height 1.25
TSSOP24 [mm]
  rect 1.5x0.35 smd mask+0.08: 1(-2.819,3.575) 2(-2.819,2.925) 3(-2.819,2.275) 4(-2.819,1.625) 5(-2.819,0.975) 6(-2.819,0.325) 7(-2.819,-0.325) 8(-2.819,-0.975) 9(-2.819,-1.625) 10(-2.819,-2.275) 11(-2.819,-2.925) 12(-2.819,-3.575) 13(2.819,-3.575) 14(2.819,-2.925) 15(2.819,-2.275) 16(2.819,-1.625) 17(2.819,-0.975) 18(2.819,-0.325) 19(2.819,0.325) 20(2.819,0.975) 21(2.819,1.625) 22(2.819,2.275) 23(2.819,2.925) 24(2.819,3.575)
  silkscreen extent -2.91,-4 1.8,4.44, body extent -3.23,-3.95 3.23,3.95, height 1.25

## Part data
C1 C2 C4 C5 C9 C10 C14 C16 C20 C22 C23 C24 C25 C26 C33 C43 C49 C51 C53 C55 C58 C59 C60: library part _CAP_C_2, "CAP"
C3 C6 C17 C18 C19 C21: library part CN-ALU-SMD, "TAJC476K020RNJ", LatestRevisionDate=17-Jul-2002, LatestRevisionNote="Re-released for DXP Platform.", PackageReference=POLAR0.8, Published=8-Jun-2000, Publisher="Altium Limited"
D1: library part "DIODE SCHOTTKY", "DIODE SCHOTTKY"
D10 D11 D12 D13 D14 D15 D16 D17 D18 D19 D20 D21 D22 D23 D24 D25 D26 D27 D28 D29 D30 D31 D32 D33 D36 D37 D38 D39 D40 D41 D42 D43: library part "Diode SMD", Code - JEDEC=DO-214-AB, Published=8-Jun-2000, Publisher="Altium Limited", Revision="July-2002: Re-released for DXP Platform."
DZ1 DZ2: library part "DIODE Zener", "Zenner"
FB1 FB2: library part _IND
J1 J2: library part "Header 11x1_2M"
J3: "CLP - Samtec 1.27mm Tiger Claw Rugged Reliable Dual Wipe Socket Strip", Package=None, Check_prices=https://www.snapeda.com/parts/CLP-111-02-L-D/Samtec/view-part/?ref=eda, MF=Samtec, MP=CLP-111-02-L-D, SnapEDA_Link=https://www.snapeda.com/parts/CLP-111-02-L-D/Samtec/view-part/?ref=snap
L1: "FIXED IND 22UH 2.5A 170 MOHM SMD"
LD1 LD2 LD3 LD4 LD5 LD6 LD7 LD8 LD9 LD10 LD11 LD12 LD13 LD14 LD15 LD16 LD17 LD18 LD19 LD20 LD21 LD22 LD23 LD24: library part LD, "OPV302"
LD25 LD26 LD27 LD28 LD29 LD30 LD31 LD32: library part LD_RLD65NZX1, "RLD65NZX1"
Q1 Q2: library part P_MOSFET
R1 R2 R4 R5 R7 R8 R9 R10 R11 R12 R13 R14 R15 R16 R17 R18 R19 R20 R22 R23 R25 R26 R27 R28 R29 R30 R31 R38 R39 R40 R41 R42 R43 R44 R45 R46 R47: library part _RES_B_2, "RES"
R3 R6 R21 R48: library part RES_SMD_SHUNT, "RN73R1JTTD30R0B25"
R24 R49: library part RES_SMD_SHUNT, "RT0603BRD077R5L"
TP1 TP7 TP8 TP9 TP13 TP14 TP15 TP16 TP17 TP18 TP19 TP20 TP21 TP22: library part "Test Point", "Test Point", Solder=NF
U1: "5.5V to 36V Input, 3A, 500kHz Step-Down Converter", Package="HSOIC-8 Texas Instruments", Availability="In Stock", Check_prices=https://www.snapeda.com/parts/TPS5430DDAR/Texas+Instruments/view-part/?ref=eda, MF="Texas Instruments", MP=TPS5430DDAR, Price=None, Purchase-URL=https://pricing.snapeda.com/search/part/TPS5430DDAR/?ref=eda, SnapEDA_Link=https://www.snapeda.com/parts/TPS5430DDAR/Texas+Instruments/view-part/?ref=snap
U2 U12: library part MCP4902
U4 U6: "INA139NA/250"
U5 U7: library part LM358, "OPA2192IDR"

## Via types
v1: diameter 0.6, hole 0.3, L1_TOP to L4_BOT, tented both sides, 592 vias

## Nets (pads, with @x,y where several pads share a name; then routed paths per layer and width w, separated by ;. In a path a pad name is that pad's centre, name@x,y a point inside that pad or via, vN(x,y) a via of type N, cw(c..) or ccw(c..) an arc to the next point about the centre after c; other vN are vias at no path point)
3V3: C16.2 C20.2 C21.1 C26.2 C58.2 C60.2 FB1.2 FB2.2 R5.2 R8.1 R12.2 R13.2 R38.1 R39.2 R40.2 R41.1 R42.2 R43.1 R44.2 R45.1 R46.2 R47.2 U2.1 U11.4 U11.5 U12.1 | length 64.9
  L1_TOP w0.5: v1(14.7,19.5) 14.7,12.3 21.7,5.3 v1(30,5.3)
  L4_BOT w0.5: v1(30,5.3) 30.069,5.231 R5.2@30.069,4.39 ; v1(45.085,58.801) 45.121,58.837 R38.1@45.121,59.817 R39.2@45.121,61.341 ; R42.2@45.121,45.506 R41.1@45.121,43.942 45.156,43.907 45.156,43.03 v1(45.175,43.011) ; v1@45.165,28.325 v1(45.15,28.34) 45.162,28.352 45.162,29.579 R44.2@45.174,29.591 ; v1(49.77,28.49) 49.777,28.497 49.777,29.584 R43.1@49.784,29.591 ; v1(68.8,72.2) 71.212,72.2 72.047,73.035 C16.2@72.047,73.085 ; v1(68.9,54.3) 70.317,54.3 FB2.2@70.355,54.262 ; v1(68.9,56.1) 68.924,56.076 C60.2@70.447,56.076 ; v1(68.9,61.5) 68.949,61.549 R13.2@70.447,61.549 R12.2@70.447,63.373 ; v1(68.9,67.6) 69.3,68 70.447,68 ; v1@68.918,60.618 71.157,60.618 72.047,59.727 C58.2@72.047,59.677 ; v1(68.942,32.858) 68.961,32.878 70.378,32.878 R40.2@70.4,32.9 ; v1(69.262,48.115) 70.432,48.115 70.447,48.131 R46.2@70.447,49.8 ; FB1.2@70.447,67.212 70.447,68 ; C26.2@70.447,68.912 70.447,68 ; C58.2@71.955,59.677 71.955,58.845 73.015,57.785 U12.1@74.041,57.785 ; C58.2@71.961,59.684 73.743,59.684 R45.1@73.749,59.69 ; R8.1@73.495,73.098 73.489,73.092 72.053,73.092 72.197,72.948 72.197,72.874 74.041,71.03 U2.1@74.041,70.73
  other v1: 14.7,20.467 14.7,21.433 14.7,22.4 68.9,60.6
5V: C4.2 C5.2 C6.1 C18.1 C19.1 L1.2 R2.2 TP1.1 U11.1 U11.2 | length 17.9
  L4_BOT w0.5: R2.2@3.6,21.4 3.575,21.4 3.525,21.35 3.525,21.325 2.2,20 2.2,13.3 2.9,12.6 11.1,12.6
12V_EXP: C2.2 C3.1 C10.2 C17.1 C23.2 C33.2 C43.2 C49.2 C51.2 C53.2 C55.2 J1.1 J2.1 J3.01 J3.02 R1.2 R3.1 R3.3 R9.1 R18.1 R21.1 R21.3 U1.7 U3.2 U4.5 U5.8 U6.5 U7.8 U8.2 U9.2 U10.2 | length 52.7
  L4_BOT w0.3: v1(43.95,69.1) 43.919,69.131 43.919,70.419 44.447,70.947 45.12,70.947 C49.2@45.121,70.946 ; v1(43.99,53.96) 44.902,54.872 44.902,55.203 44.981,55.281 45.121,55.281 C53.2@45.121,55.499 ; C49.2@45.121,70.89 45.277,70.735 45.277,70.115 45.452,69.94 46.658,69.94 46.834,69.764 46.834,68.884 U8.2@46.859,68.859 ; C53.2@45.205,55.365 45.96,54.61 46.609,54.61 46.859,54.36 U9.2@46.859,53.162
  L4_BOT w0.35: C51.2@70.057,38.1 71.394,38.1 72.106,38.812 U3.2@72.106,40.662
  L4_BOT w0.4: C3.1@15.24,25.146 C17.1@19.739,25.146 C17.1@19.939,25.146 ; v1(43.9,39.8) 43.936,39.836 C55.2@45.121,39.836 45.196,39.761 45.196,39.13 45.509,38.817 46.512,38.817 46.859,38.471 U10.2@46.859,37.465
  L4_BOT w0.5: U5.8@35.441,22.826 35.872,22.826 35.918,22.779 C10.2@35.918,21.048 C10.2@35.918,21.048 v1@35.919,19.071 ; U7.8@35.495,10.461 35.926,10.461 35.972,10.415 C33.2@35.972,8.503 35.971,8.502 35.971,7.394 v1(35.969,7.393) ; v1(35.92,29.4) 35.956,29.364 R9.1@35.956,28.541 ; v1(35.998,17.163) 36.01,17.151 R18.1@36.01,16.123 ; R1.2@36,4.4 v1(36,5.4) ; C23.2@47.404,25.06 47.604,24.86 48.101,24.86 48.611,24.349 48.611,24.309 v1(48.63,24.29) ; C23.2@47.458,25.06 47.608,24.91 47.608,24.569 47.611,24.567 U4.5@47.611,23.322 ; v1(47.5,15.6) 47.481,15.581 47.481,14.704 C43.2@47.458,14.681 47.458,14.631 47.611,14.478 U6.5@47.611,12.903 ; v1(67.219,5.284) 67.219,6.25 68.123,6.25 68.173,6.2 v1(68.2,6.2) ; J2.1@67.25,6.519 J2.1@67.25,6.8 ; C51.2@69.9,38.2 69.9,42.673 70.5,43.273 v1(70.5,43.3) ; J1.1@75.2,30 J1.1@75.6,30 ; v1(75.2,31) 75.2,30.15 75.35,30 J1.1@75.6,30 ; v1(76.8,30) J1.1@75.6,30 ; v1@35.919,19.071 v1(35.92,19.07)
  other v1: 44.254,7.428 44.254,17.782 22.4,24.8 22.4,25.8 22.4,26.9
DAC_DRV_EXT: R26.1 TP20.1 U12.14 | length 83.3
  L1_TOP w0.4: v1(25.4,44.5) 50.5,44.5 57.2,51.2 v1(69.1,51.2)
  L4_BOT w0.2: TP20.1@69,50.2 TP20.1@69.05,50.25 ; v1@69.05,51.15 v1(69.1,51.2)
  L4_BOT w0.3: TP20.1@69.05,50.25 v1@69.05,51.15
  L4_BOT w0.4: v1(25.4,44.5) 25.382,44.482 25.382,30.582 24.73,29.93 24.73,16.177 26.143,14.764 R26.1@26.193,14.764 ; v1(69.1,51.2) 73.506,51.2 U12.14@74.016,51.71
DAC_DRV_INT: R25.1 TP7.1 U2.14 | length 82.9
  L1_TOP w0.4: v1(26.5,57.6) 54,57.6 57.423,61.023 65.509,61.023 v1(68.932,64.446)
  L4_BOT w0.4: R25.1@26.139,27.055 R25.1@26.219,27.135 ; R25.1@26.219,27.055 R25.1@26.219,27.135 ; v1(26.5,57.6) 26.5,57.546 26.219,57.265 R25.1@26.219,27.135 ; TP7.1@68.9,63.4 68.916,63.416 68.916,64.43 v1(68.932,64.446) 68.986,64.446 69.169,64.263 73.624,64.263 74.041,64.68 U2.14@74.041,65.08
DAC_nCS: D7.2 J1.6 J3.12 R8.2 U2.3 | length 109.3
  L1_TOP w0.3: v1(55.3,71.1) 58.338,74.138 v1(73.905,74.138) ; J3.12@61,14.365 64.565,10.8 67.581,10.8 70.086,13.305 70.086,22.386 v1(71.5,23.8)
  L4_BOT w0.3: v1(55.3,71.1) 55.3,60.988 55.084,60.772 55.084,44.897 56.232,43.749 56.232,31.868 64.3,23.8 v1@71.581,23.8 ; v1(71.5,23.8) 72.041,24.341 72.762,24.341 D7.2@72.872,24.45 ; D7.2@72.897,24.45 73.597,23.75 J1.6@75.2,23.75 ; v1(73.905,74.138) 75.095,72.948 75.095,72.814 75.341,72.568 U2.3@75.341,70.73
EXT_LASER_ADC: D9.1 D9.2 J2.11 J3.21 R28.1 U6.1 | length 24.3
  L1_TOP w0.3: J3.21@54.65,15.635 54.647,15.635 53.3,14.288 53.3,7 v1(54.8,5.5)
  L4_BOT w0.4: R28.1@47.458,8.427 R28.1@47.611,8.58 ; U6.1@47.611,10.283 R28.1@47.611,8.58 ; D9.2@53.23,8.704 47.735,8.704 R28.1@47.611,8.58 ; D9.2@53.23,8.729 53.294,8.665 55.066,8.665 D9.1@55.13,8.729 55.13,7.58 54.75,7.2 J2.11@54.75,6.8 54.775,6.775 54.775,5.525 v1(54.8,5.5)
EXT_LASER_DAC_LATCH: D34.1 J2.7 J3.13 R47.1 U12.8 | length 103.9
  L1_TOP w0.3: J3.13@59.73,15.635 58.165,17.2 54.228,17.2 52.3,15.272 52.3,6.193 54.247,4.246 58.827,4.246 59.7,5.119 v1(59.7,5.2) 61.91,7.41 74.71,7.41 v1(76.9,9.6)
  L2_SIGNAL w0.3: v1(76.9,9.6) 77.788,9.6 79.7,11.512 79.7,38.106 75.731,42.074 75.731,45.931 78,48.2 v1(78,50.9)
  L4_BOT w0.3: D34.1@58.663,8.725 58.663,8.704 59.5,7.867 59.5,7.05 J2.7@59.75,6.8 59.725,6.775 59.725,5.225 v1(59.7,5.2)
  L4_BOT w0.35: R47.1@71.955,48.1 75.7,48.1 77.99,50.39 77.99,50.89 v1(78,50.9) 78,50.914 77.941,50.973 U12.8@77.941,52.135
EXT_LASER_DAC_nCS: D35.2 J2.6 J3.11 R45.2 U12.3 | length 109.2
  L1_TOP w0.3: J3.11@61,15.635 58.935,17.7 54.021,17.7 51.8,15.479 51.8,5.986 54.04,3.746 59.646,3.746 v1(61,5.1) 62.81,6.91 75.058,6.91 78,9.851 v1(78,10.7)
  L2_SIGNAL w0.3: v1(75.341,58.753) 78.133,55.961 78.133,52.222 77.2,51.289 77.2,48.6 75.231,46.631 75.231,40.422 79,36.654 79,11.661 78.039,10.7 v1(78,10.7)
  L4_BOT w0.3: D35.2@60.296,8.729 60.596,8.429 60.596,7.604 61,7.2 v1(61,5.1) ; U12.3@75.341,57.785 v1(75.341,58.753) 75.345,58.757 75.345,59.686 R45.2@75.349,59.69
EXT_LASER_SPI_MISO: D44.2 J2.4 J3.07 | length 44.2
  L1_TOP w0.3: v1(63.5,5) 61.246,2.746 53.626,2.746 50.8,5.572 50.8,15.893 53.607,18.7 60.475,18.7 J3.07@63.54,15.635
  L4_BOT w0.3: v1(63.5,5) 63.5,6.689 63.529,6.718 63.529,8.429 D44.2@63.829,8.729
EXT_LASER_SPI_MOSI: D44.1 J2.3 J3.05 U3.3 U12.5 | length 119.8
  L1_TOP w0.3: v1(54.5,40.6) 64.693,40.6 66.793,38.5 v1(72.678,38.5) ; v1(64.8,5) 62.046,2.246 53.419,2.246 50.3,5.364 50.3,16.1 53.4,19.2 61.245,19.2 J3.05@64.81,15.635
  L4_BOT w0.3: v1(54.5,40.6) 54.5,31.374 64.8,21.074 64.8,16.623 J3.05@64.81,16.613 ; v1(64.8,5) 64.775,5.025 64.775,6.725 64.725,6.775 65,7.05 65,7.975 65.729,8.704 D44.1@65.729,8.754 ; v1(72.678,38.5) 72.731,38.553 72.731,40.637 U3.3@72.756,40.662 72.756,43.318 79.6,50.163 79.6,53.607 76.641,56.566 U12.5@76.641,57.785
EXT_LASER_SPI_SCK: D35.1 J2.5 J3.09 U3.1 U12.4 | length 109.1
  L1_TOP w0.3: v1(54.307,41.49) 64.51,41.49 66.8,39.2 v1(71.4,39.2) ; J3.09@62.27,15.635 59.705,18.2 53.814,18.2 51.3,15.686 51.3,5.779 53.833,3.246 60.546,3.246 v1(62.3,5)
  L4_BOT w0.3: v1(54.307,41.49) 54.307,41.409 53.9,41.002 53.9,31.1 62.27,22.73 J3.09@62.27,16.613 ; D35.1@62.25,8.675 J2.5@62.25,6.8 62.275,6.775 62.275,5.025 v1(62.3,5) ; v1(71.4,39.2) 71.431,39.231 71.431,40.637 U3.1@71.456,40.662 71.456,42.725 79.1,50.37 79.1,53.4 75.991,56.509 U12.4@75.991,57.785
EXT_LASER_SW_CS: D34.2 J2.9 J3.17 U3.24 | length 51.3
  L1_TOP w0.3: v1(57.1,26.9) 62.134,26.9 v1(70.245,35.011) ; J3.17@57.19,15.635 56.125,16.7 54.436,16.7 52.8,15.064 52.8,6.4 54.354,4.846 57.146,4.846 v1(57.2,4.9)
  L4_BOT w0.3: D34.2@56.763,8.704 57.25,8.217 J2.9@57.25,6.8 57.225,6.775 57.225,4.925 v1(57.2,4.9) ; v1(57.1,26.9) 57.145,26.855 57.145,16.658 J3.17@57.19,16.613 ; v1(70.245,35.011) 70.258,35.023 U3.24@71.456,35.023